# Altium PCB PCB1.PcbDoc
Units mil, origin at the board's own origin, x right, y up, seen from the top; angles counter-clockwise.
Board outline 4360 x 4560 mil, 4 copper layers (Top Layer, Layer 1, Layer 2, Bottom Layer), stack 23.756 mil thick; 48 components, 114 nets, 326 pads, 38 vias.
Unrouted connection lines stored in the file: 18.
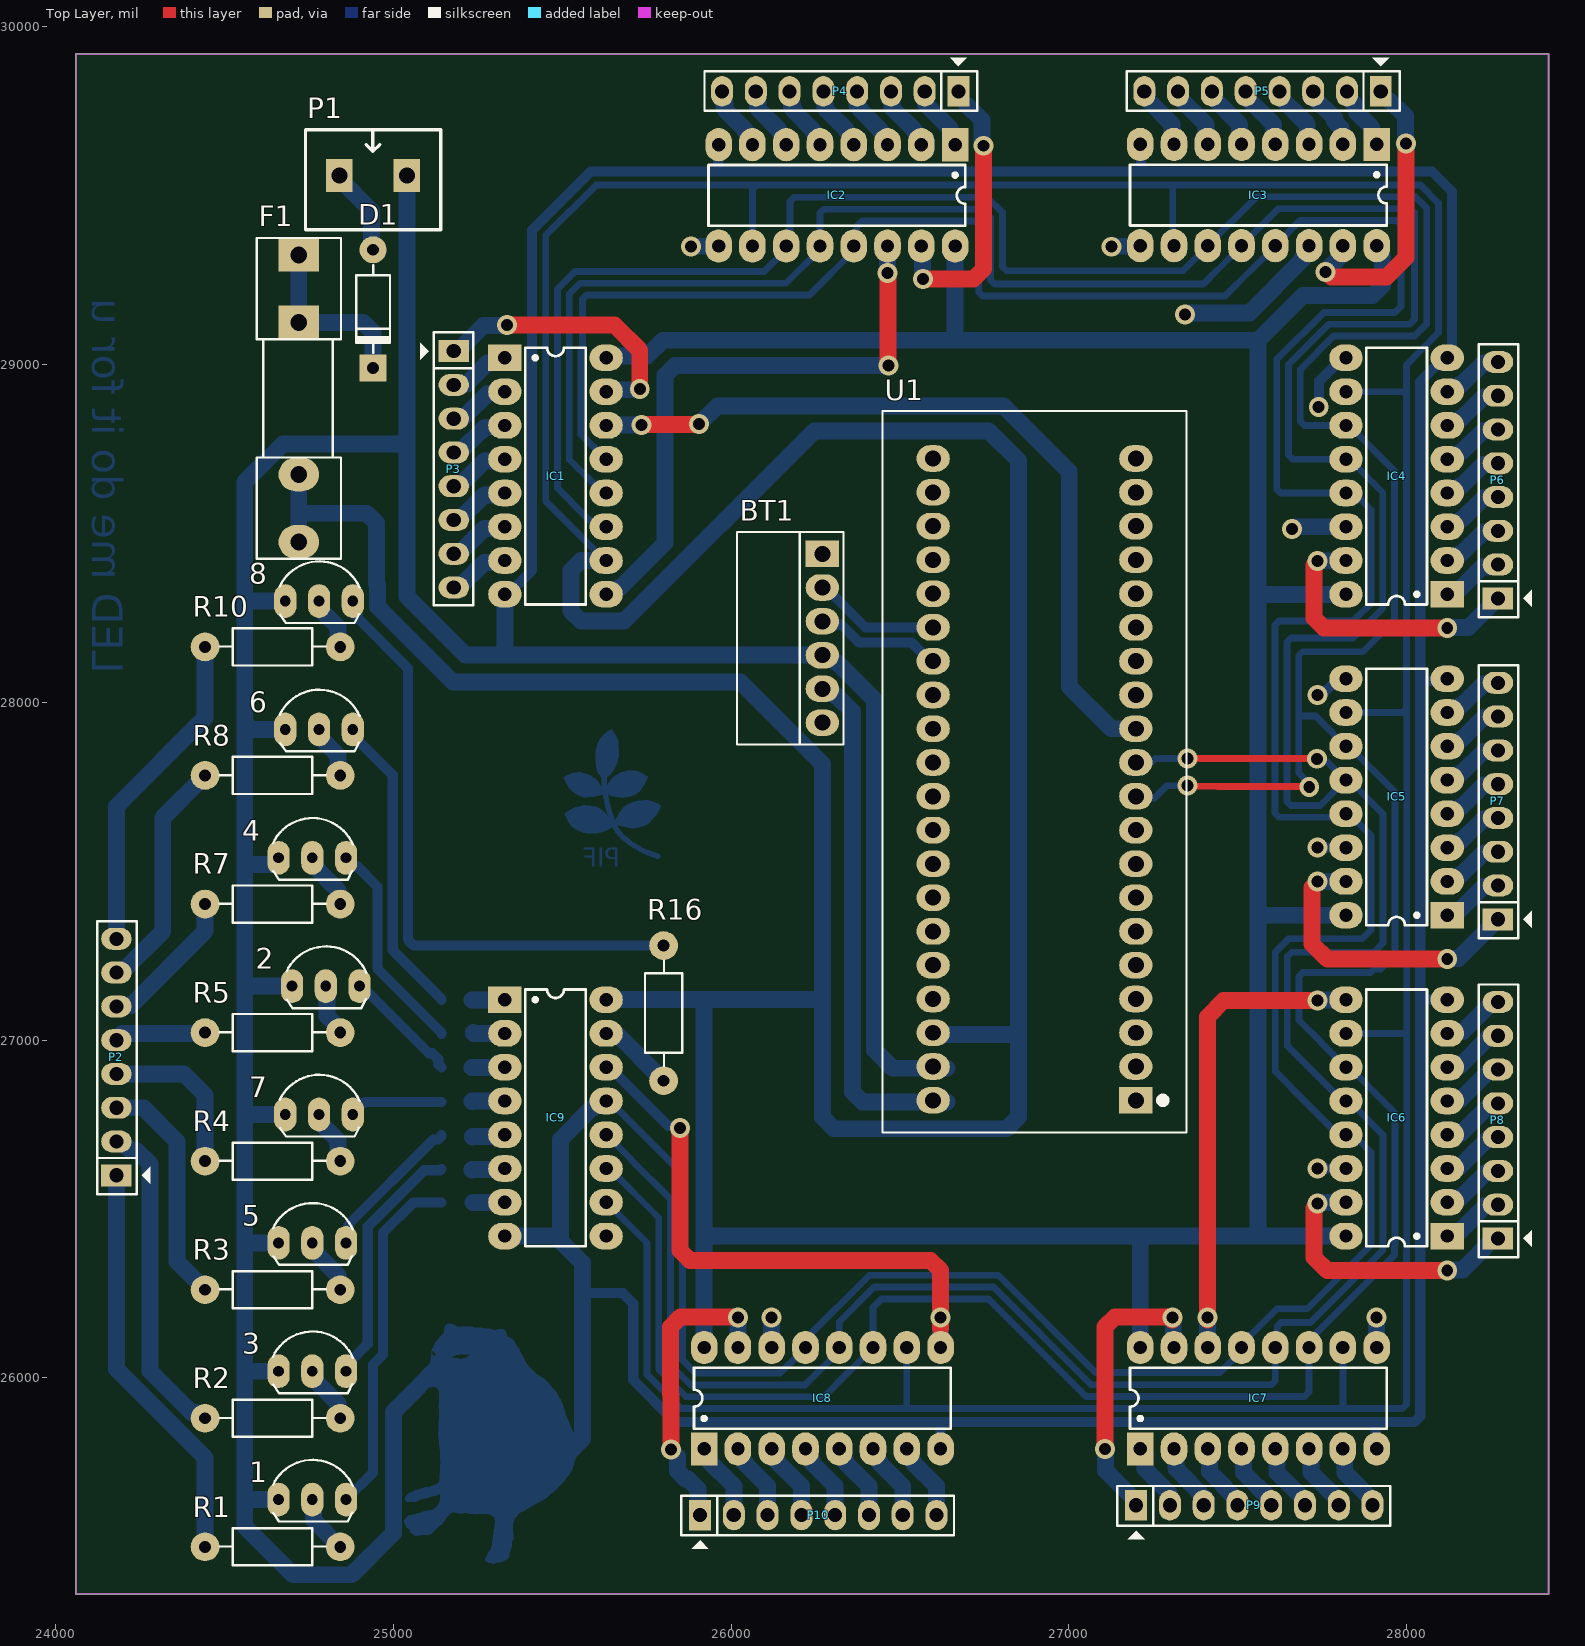
[diagram p0: Top Layer view]
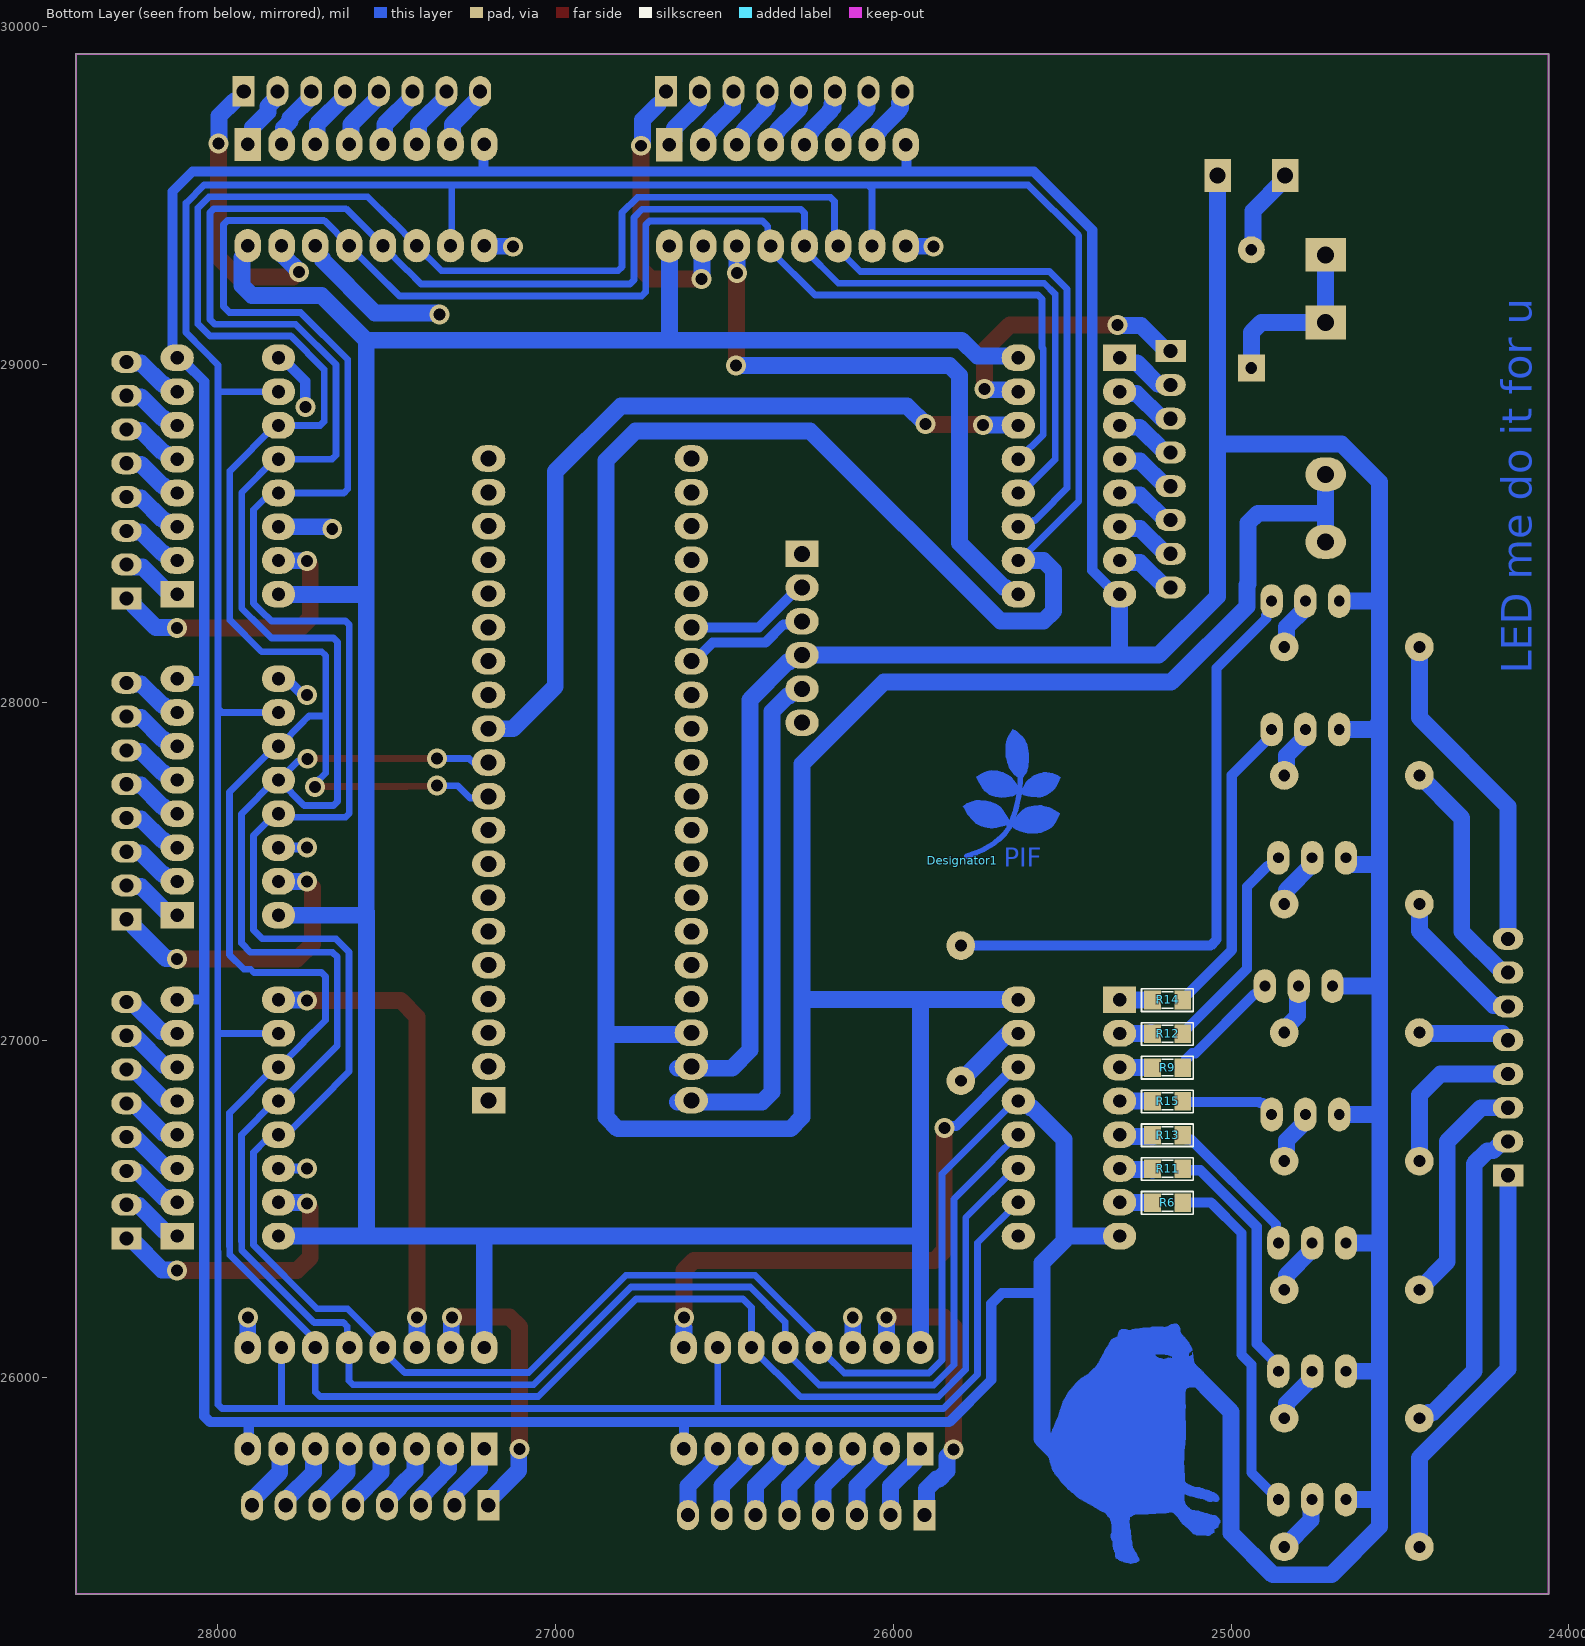
[diagram p1: Bottom Layer view, seen from below]
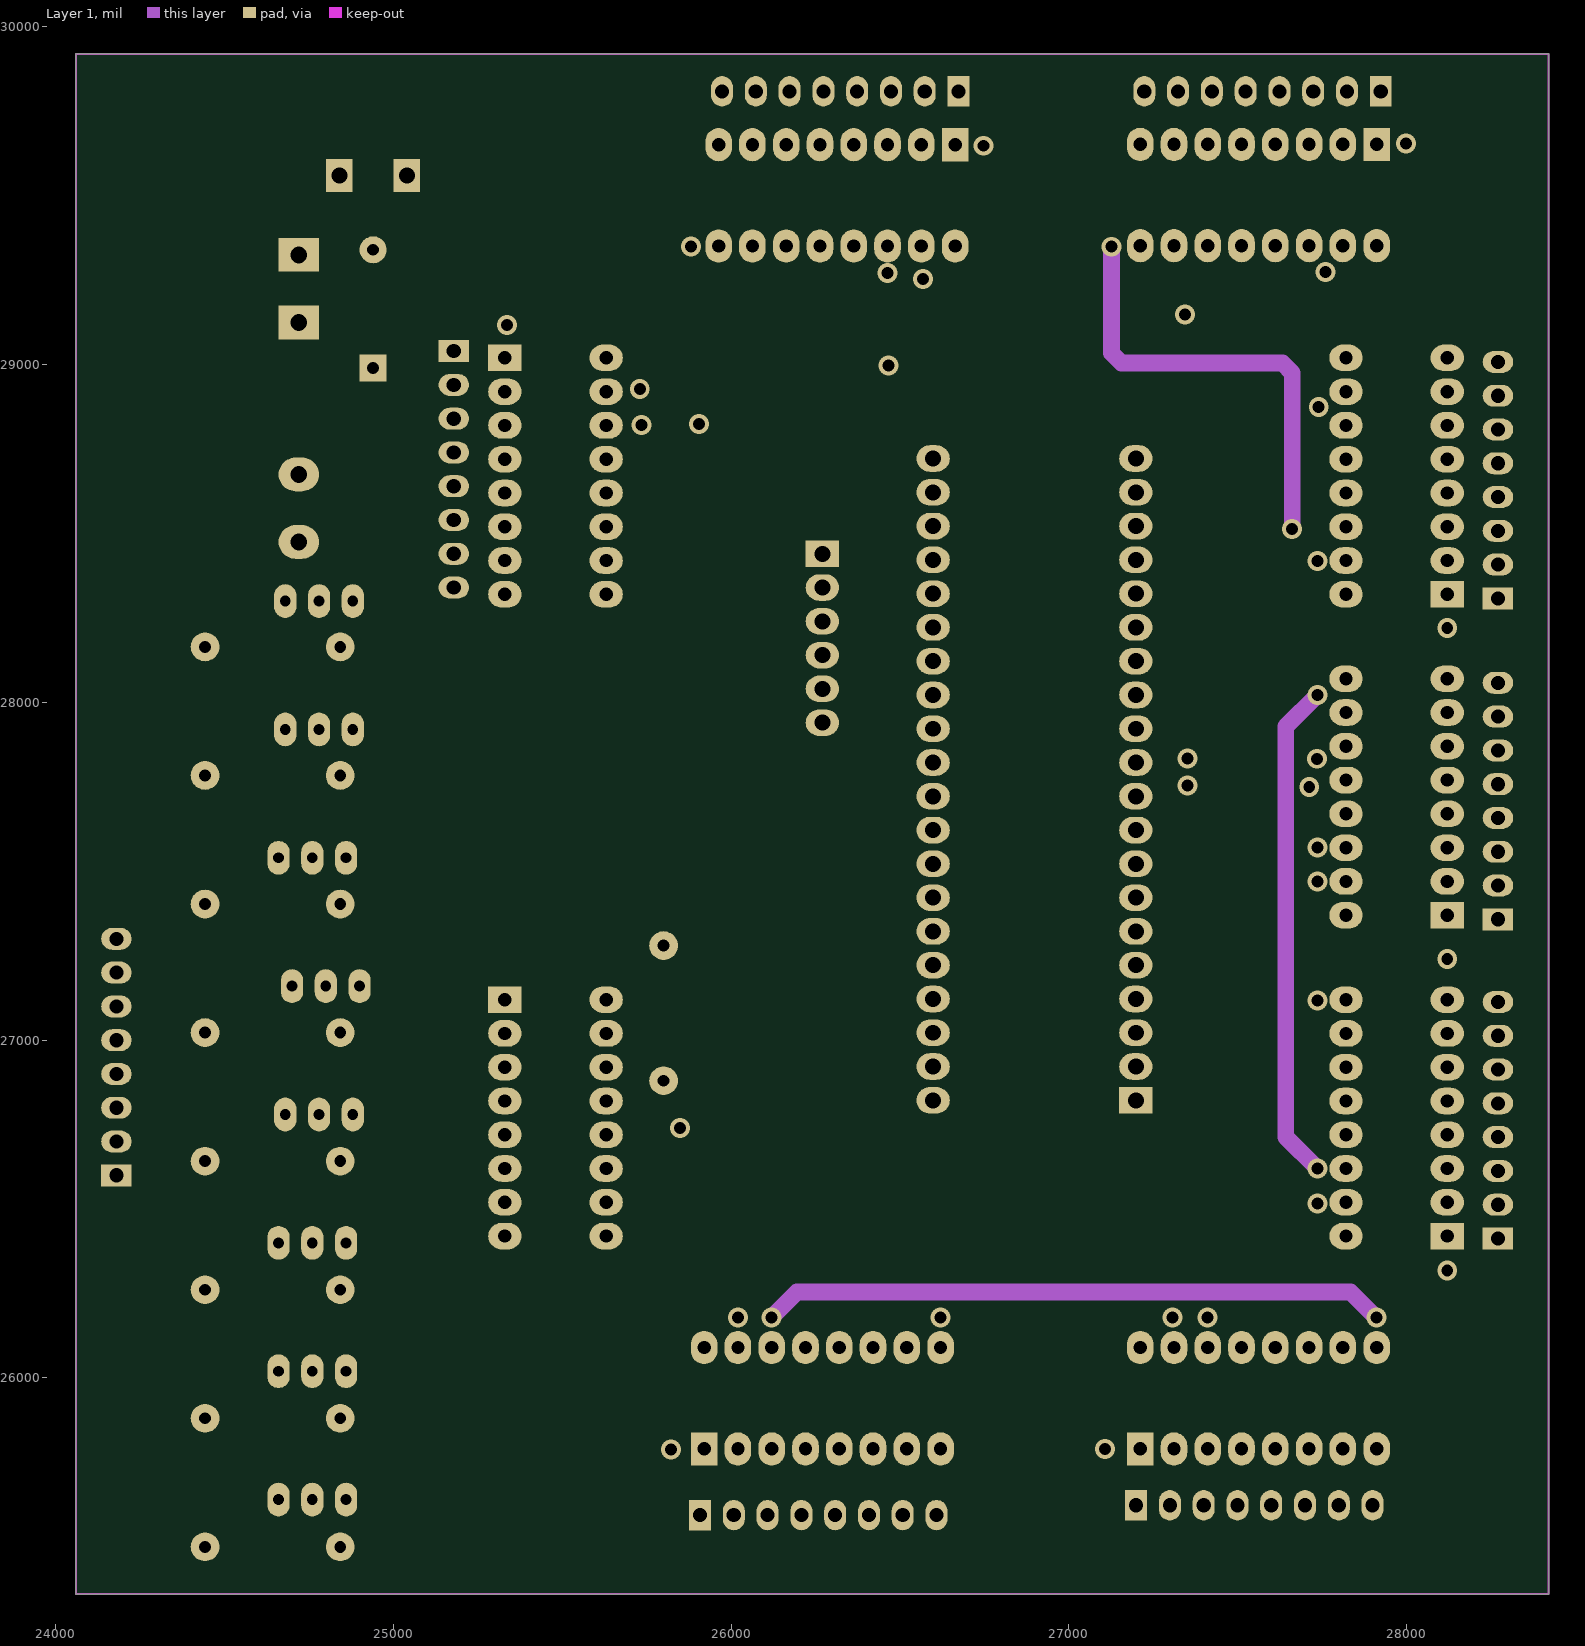
[diagram p2: Layer 1]
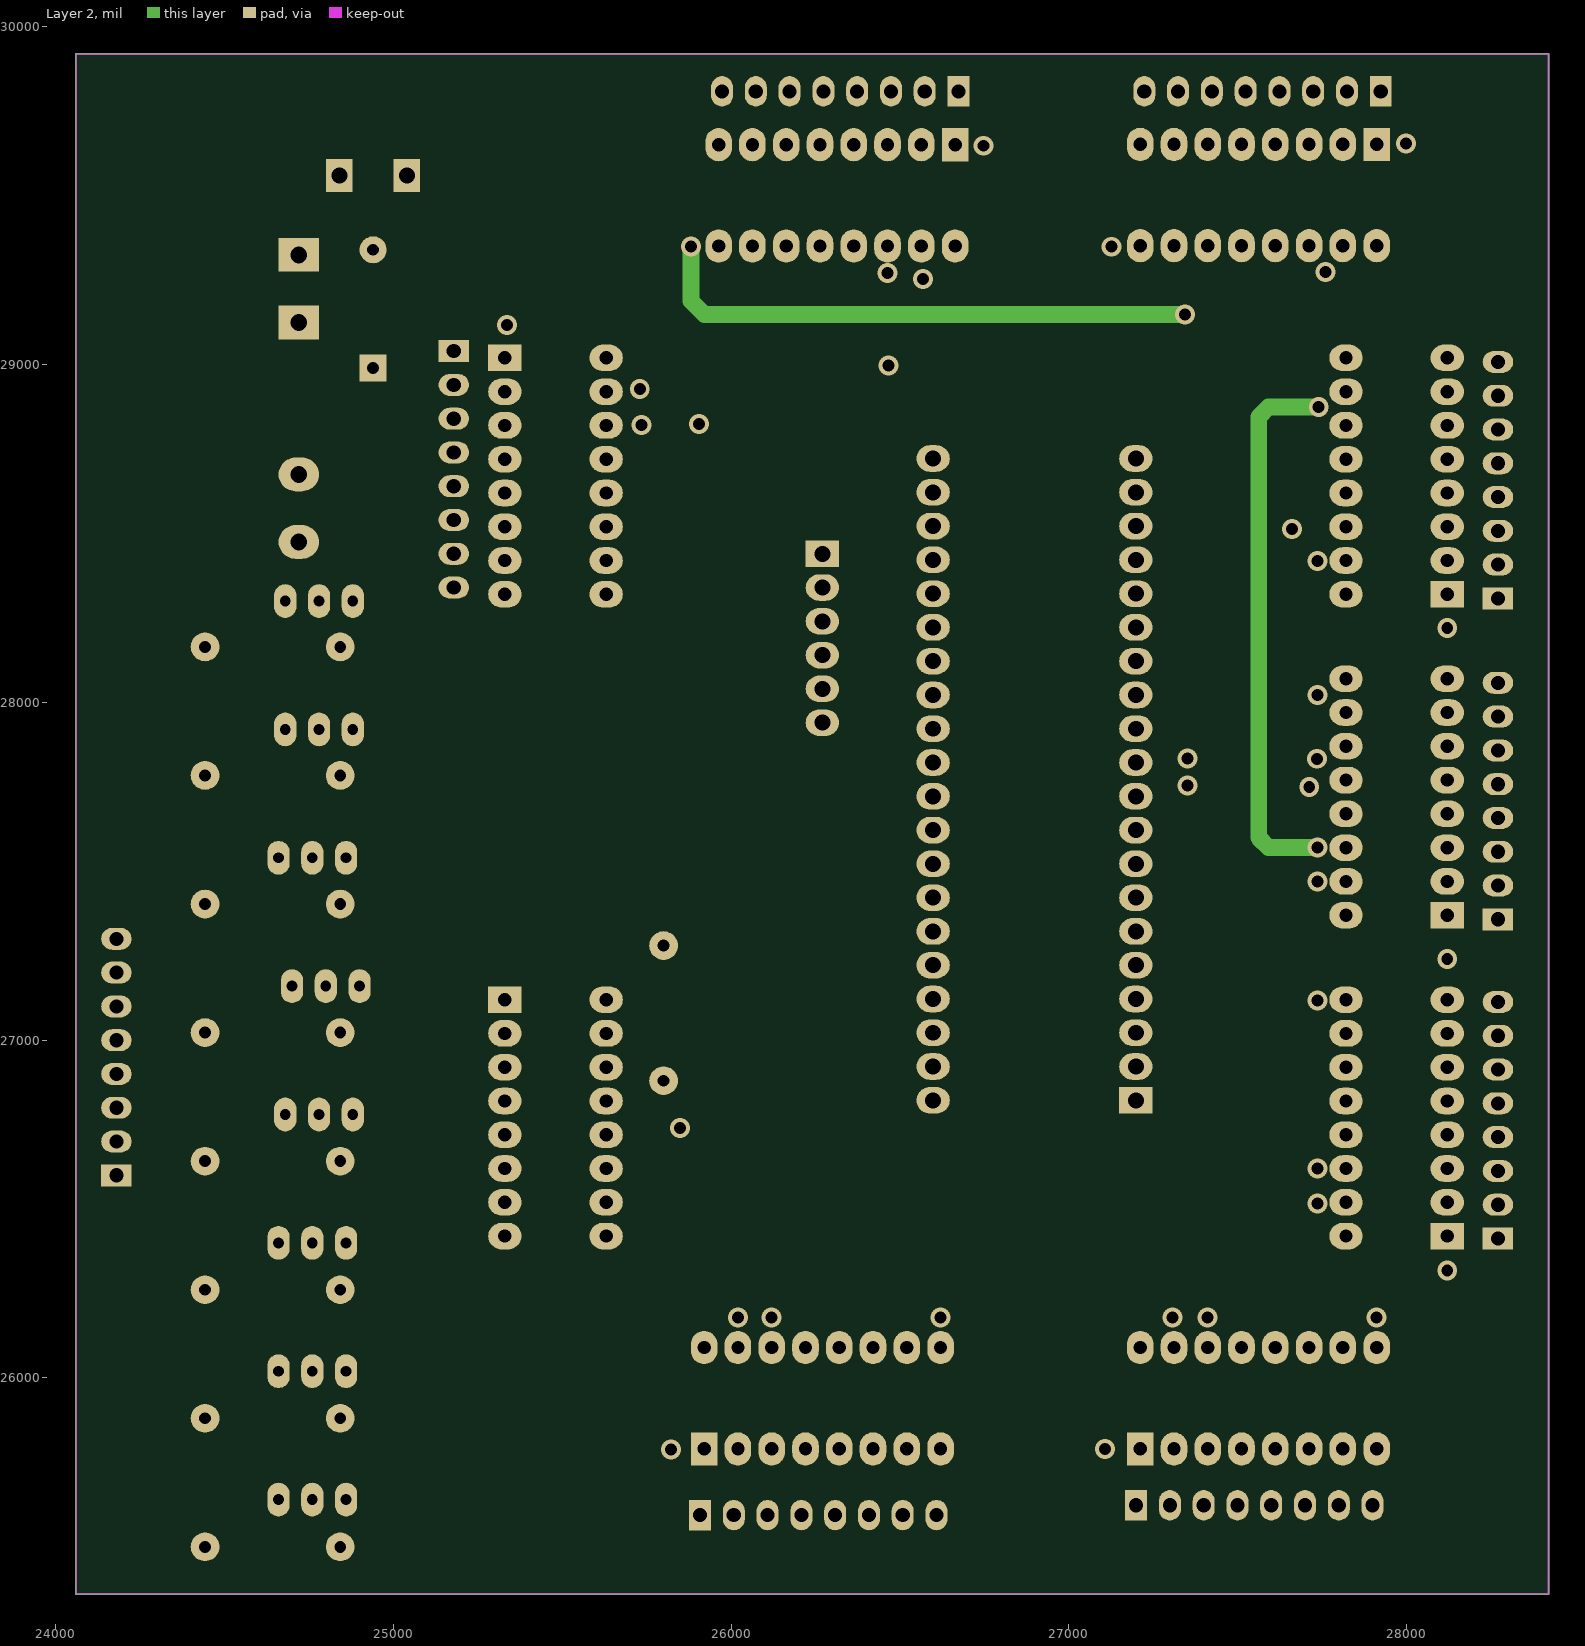
[diagram p3: Layer 2]
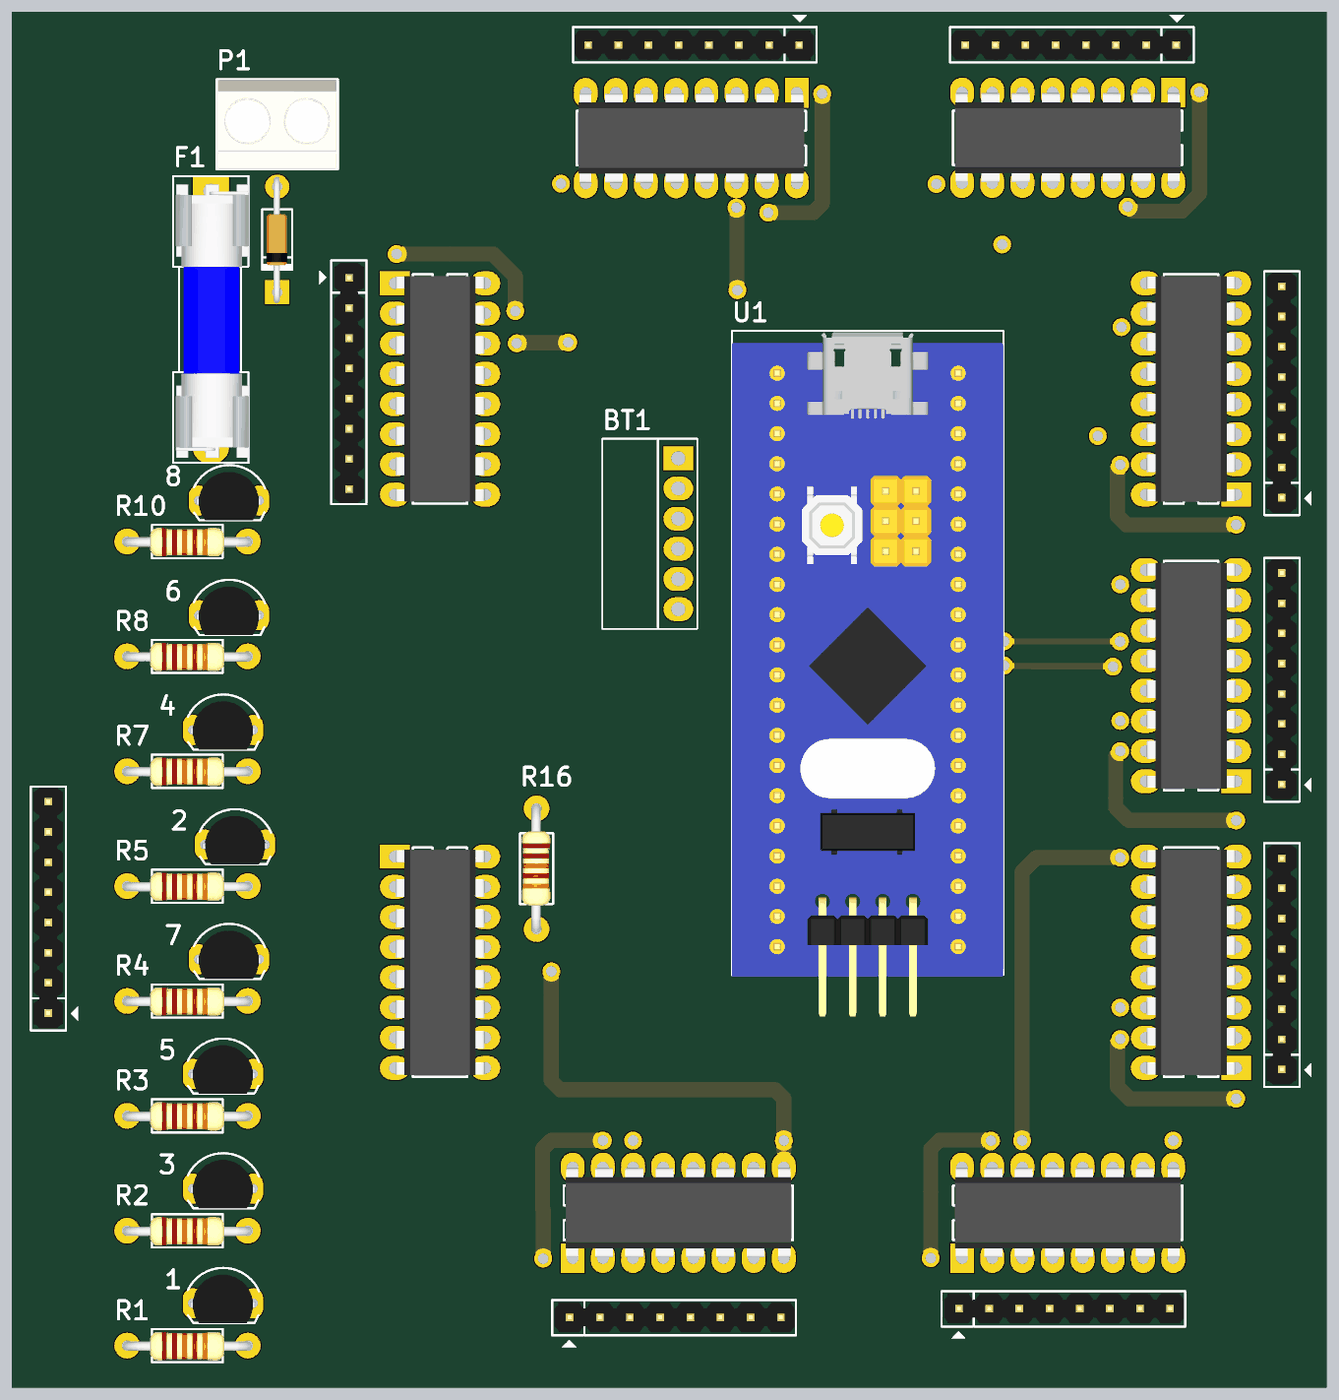
[diagram p4: 3D render of the assembled board from above, using the file's embedded part models]
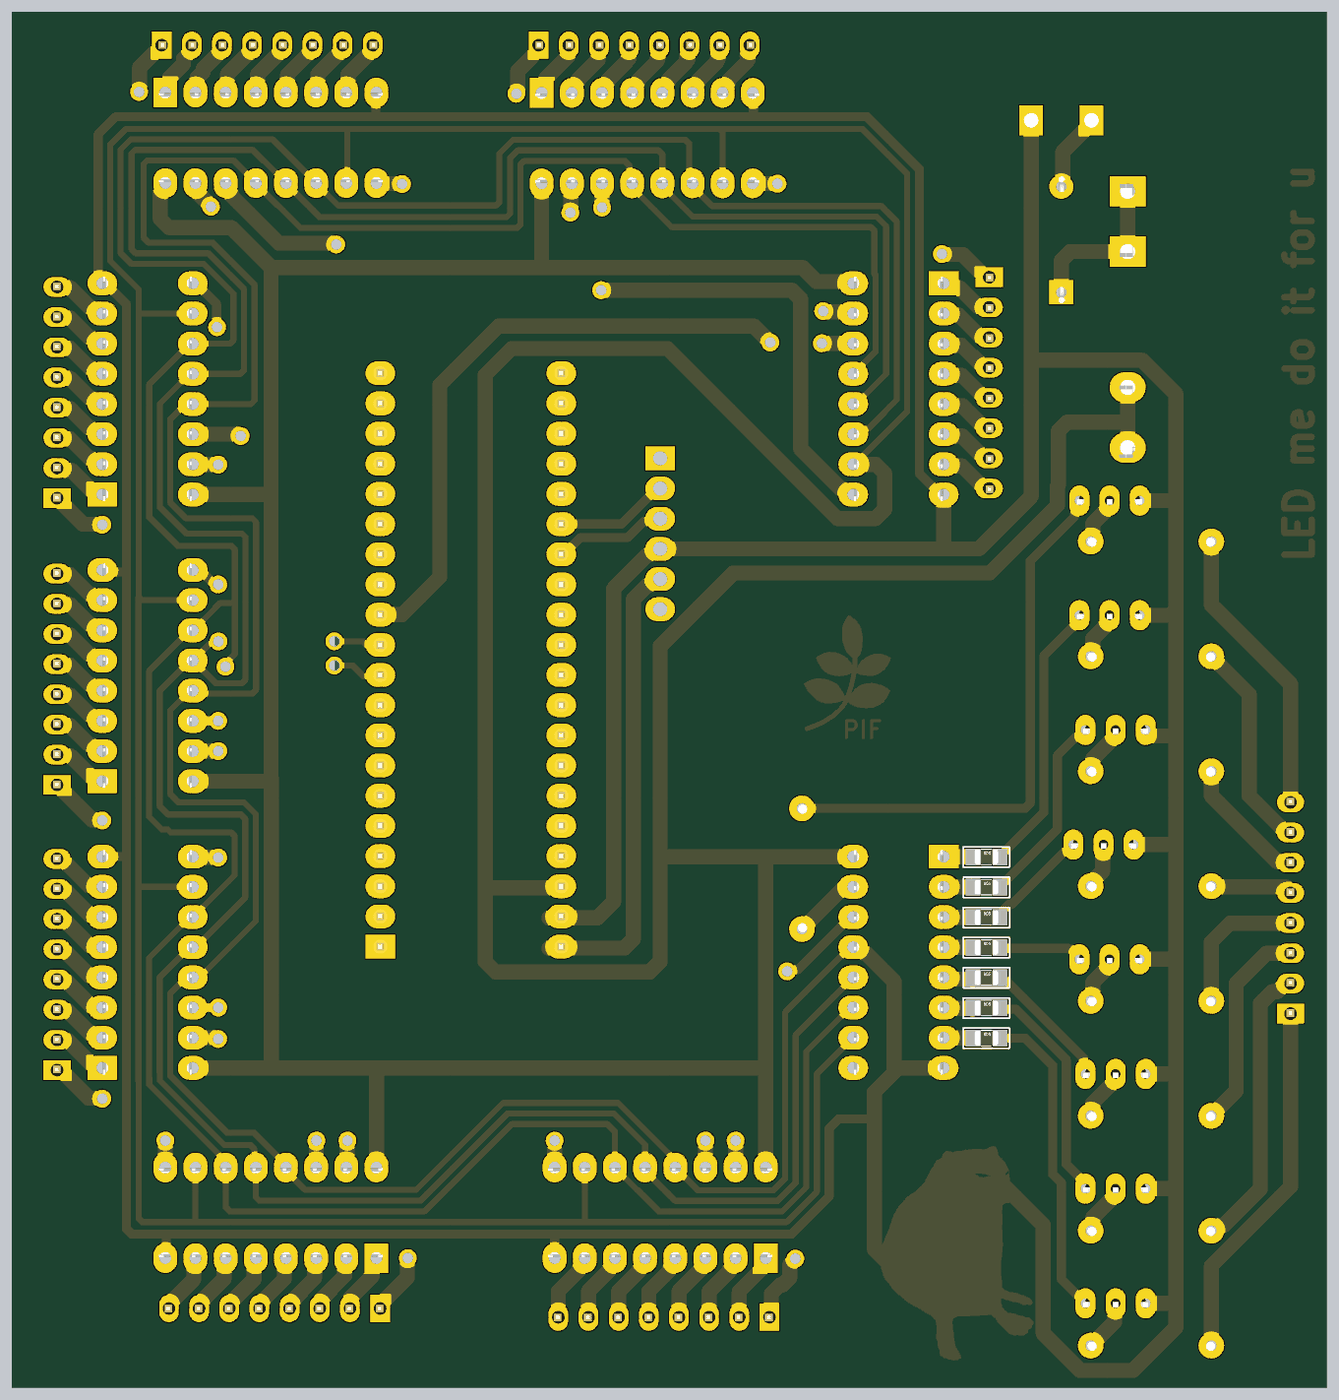
[diagram p5: 3D render of the assembled board from below, using the file's embedded part models]

## Layer stack, top to bottom
Top Solder: solder mask 0.4, Solder Resist, Dk 3.5
Top Layer: signal copper 1.4
Dielectric 2: prepreg 2.8, PP-006, Dk 4.1
Layer 1: signal copper 1.378
Dielectric 1: dielectric 12.6, FR-4, Dk 4.8
Layer 2: signal copper 1.378
Dielectric 3: prepreg 2.8, PP-006, Dk 4.1
Bottom Layer: signal copper 1.4
Bottom Solder: solder mask 0.4, Solder Resist, Dk 3.5

## Board outline
24060,25360 24060,29920 28420,29920 28420,25360

## Design rules (kind name [scope] priority, off if disabled: settings)
Clearance [All] p1: gap=15 ignorepadtopadclearanceinfootprint=FALSE
Height [All] p1: minheight=0 maxheight=10000 prefheight=500
PolygonConnect [All] p1: connectstyle=Direct reliefconductorwidth=10 reliefentries=4 polygonreliefangle="90 Angle" airgapwidth=10
RoutingVias [All] p1: holewidth=28 width=50 viastyle="Through Hole" minholewidth=28 minwidth=50 maxholewidth=39.37 maxwidth=59.06
SolderMaskExpansion [All] p1: expansion=4 istentingtop=FALSE
Width [All] p1: maxlimit=50 minlimit=20 preferedwidth=30
29 further rules are at their usual default settings.

## Classes and differential pairs
net class [0..72]: 0 1 2 3 4 5 6 7 8 9 10 11 12 13 14 15 16 17 18 19 20 21 22 23 24 25 26 27 28 29 30 31 32 33 34 35 36 37 38 39 40 41 42 43 44 45 46 47 48 49 50 51 52 53 54 55 56 57 58 59 60 61 62 63 64 65 66 67 68 69 70 71 72
component class Signal: BT1 U1
component class Shift: IC1 IC2 IC3 IC4 IC5 IC6 IC7 IC8 IC9
component class Power: D1 F1 P1
component class Designator: 1 2 3 4 5 6 7 8 P2 P3 P4 P5 P6 P7 P8 P9 P10 R1 R2 R3 R4 R5 R6 R7 R8 R9 R10 R11 R12 R13 R14 R15 R16

## Components (designator, comment, footprint, x,y, rotation, side; value= is the part's Value field where it differs from the comment)
1 "C1815" QTO-92 24760,25640 r0 top
2 "C1815" QTO-92 24800,27160 r0 top
3 "C1815" QTO-92 24760,26020 r0 top
4 "C1815" QTO-92 24760,27540 r0 top
5 "C1815" QTO-92 24760,26400 r0 top
6 "C1815" QTO-92 24780,27920 r0 top
7 "C1815" QTO-92 24780,26780 r0 top
8 "C1815" QTO-92 24780,28300 r0 top
BT1 "HC-05" HC-05 26270,28190 r270 top
D1 "Diode" D1A 24940,29340 r90 top
Designator1 "Comment" "PIF LOGO BIG TOP" 25794,27531 r180 bottom
F1 "Fuse" FUSE 24720,28900 r270 top
IC1 "74HC595" 74HC595 25480,28670 r270 top
IC2 "74HC595" 74HC595 26313,29501 r180 top
IC3 "74HC595" 74HC595 27561,29502 r180 top
IC4 "74HC595" 74HC595 27970,28670 r90 top
IC5 "74HC595" 74HC595 27970,27720 r90 top
IC6 "74HC595" 74HC595 27970,26770 r90 top
IC7 "74HC595" 74HC595 27561,25940 r0 top
IC8 "74HC595" 74HC595 26270,25940 r0 top
IC9 "74HC595" 74HC595 25480,26770 r270 top
P1 "Domino 2" "DOMINO 2- 5mm" 24940,29560 r0 top
P2 "Header 8" JP8 24180,26600 r90 top
P3 "Header 8" JP8 25179,29040 r270 top
P4 "Header 8" JP8 26673,29809 r180 top
P5 "Header 8" JP8 27923.13,29809 r180 top
P6 "Header 8" JP8 28270,28307.87 r90 top
P7 "Header 8" JP8 28270,27357.87 r90 top
P8 "Header 8" JP8 28270,26413 r90 top
P9 "Header 8" JP8 27198.87,25623 r0 top
P10 "Header 8" JP8 25907.87,25594 r0 top
R1 "RESISTOR" "RES 1/2W" 24842.5,25500 r180 top value=1K
R2 "RESISTOR" "RES 1/2W" 24842.5,25880.62 r180 top value=1K
R3 "RESISTOR" "RES 1/2W" 24842.5,26261.23 r180 top value=1K
R4 "RESISTOR" "RES 1/2W" 24842.5,26641.85 r180 top value=1K
R5 "RESISTOR" "RES 1/2W" 24842.5,27022.46 r180 top value=1K
R6 "RESISTOR" RES-SM-0805 25233,26519 r180 bottom value=1K
R7 "RESISTOR" "RES 1/2W" 24842.5,27403.08 r180 top value=1K
R8 "RESISTOR" "RES 1/2W" 24842.5,27783.69 r180 top value=1K
R9 "RESISTOR" RES-SM-0805 25233,26919 r180 bottom value=1K
R10 "RESISTOR" "RES 1/2W" 24842.5,28164.31 r180 top value=1K
R11 "RESISTOR" RES-SM-0805 25233,26619 r180 bottom value=1K
R12 "RESISTOR" RES-SM-0805 25233,27019 r180 bottom value=1K
R13 "RESISTOR" RES-SM-0805 25233,26719 r180 bottom value=1K
R14 "RESISTOR" RES-SM-0805 25233,27119 r180 bottom value=1K
R15 "RESISTOR" RES-SM-0805 25233,26819 r180 bottom value=1K
R16 "RESISTOR" "RES 1/2W" 25800,26880 r90 top value=1K
U1 "BluePill" BluePill 26898,27772 r90 top

## Footprints (in the part's own frame and the unit in brackets; to place one, negate y for a bottom-side part, rotate by r counter-clockwise, add the part's x,y. Pads: shape width x height; smd on the part's side, far side on the other; paste and mask are expansions set on the pad)
74HC595 [mm]
  rect 2x2.5 hole 1: 1(-8.89,-3.81)
  oval 2x2.5 hole 1: 2(-6.35,-3.81) 3(-3.81,-3.81) 4(-1.27,-3.81) 5(1.27,-3.81) 6(3.81,-3.81) 7(6.35,-3.81) 8(8.89,-3.81) 9(8.89,3.81) 10(6.35,3.81) 11(3.81,3.81) 12(1.27,3.81) 13(-1.27,3.81) 14(-3.81,3.81) 15(-6.35,3.81) 16(-8.89,3.81)
  silkscreen extent -9.65,-2.29 9.65,2.29, body extent -9.5,-3.75 9.5,3.75, height 4
BluePill [mm]
  rect 2x2.5 hole 1.2: 1(-24.13,-7.62)
  oval 2x2.5 hole 1.2: 2(-21.59,-7.62) 3(-19.05,-7.62) 4(-16.51,-7.62) 5(-13.97,-7.62) 6(-11.43,-7.62) 7(-8.89,-7.62) 8(-6.35,-7.62) 9(-3.81,-7.62) 10(-1.27,-7.62) 11(1.27,-7.62) 12(3.81,-7.62) 13(6.35,-7.62) 14(8.89,-7.62) 15(11.43,-7.62) 16(13.97,-7.62) 17(16.51,-7.62) 18(19.05,-7.62) 19(21.59,-7.62) 20(24.13,-7.62) 21(24.13,7.62) 22(21.59,7.62) 23(19.05,7.62) 24(16.51,7.62) 25(13.97,7.62) 26(11.43,7.62) 27(8.89,7.62) 28(6.35,7.62) 29(3.81,7.62) 30(1.27,7.62) 31(-1.27,7.62) 32(-3.81,7.62) 33(-6.35,7.62) 34(-8.89,7.62) 35(-11.43,7.62) 36(-13.97,7.62) 37(-16.51,7.62) 38(-19.05,7.62) 39(-21.59,7.62) 40(-24.13,7.62)
  silkscreen extent -26.54,-11.43 27.69,11.43, body extent -30,-11.43 27.56,11.43, height 12.35
D1A [mil] "Diode 1N4007, W 100mil, L 350mil"
  round 80 hole 35: 1(0,0)
  rect 80x80 hole 35: 2(-350,0)
  silkscreen extent -305,-50 -45,50, body extent -386,-33 34,36, height 84
"DOMINO 2- 5mm" [mm]
  rect 2x2.5 hole 1.2: 1(-2.54,0) 2(2.54,0)
  silkscreen extent -5.08,-4.08 5.08,3.43, body extent -5,-4.07 5,3.43, height 10
FUSE [mil] "De Fuse"
  rect 100x120 hole 50: 1(-425,0) 1(-225,0)
  oval 100x120 hole 50: 2(225,0) 2(425,0)
  silkscreen extent -475,-125 475,125, body extent -448,-117 459,127, height 378
HC-05 [mm]
  rect 2x2.5 hole 1.2: 1(-6.35,0)
  oval 2x2.5 hole 1.2: 2(-3.81,0) 3(-1.27,0) 4(1.27,0) 5(3.81,0) 6(6.35,0)
  silkscreen extent -8,-6.4 8,1.6, body extent -8,-6.35 8,0.2, height 40.5
JP8 [mil] "JP8"
  rect 65x90 hole 42: 1(0,0)
  oval 65x90 hole 42: 2(100,0) 3(200,0) 4(300,0) 5(400,0) 6(500,0) 7(600,0) 8(700,0)
  silkscreen extent -56,-100 752,57, body extent -48,-50 748,48, height 323
"PIF LOGO BIG TOP" [mil]
  Top Layer region: 225.34,164.82 225.4,164.84 233.33,164 233.38,163.98 233.44,163.98 240.93,161.92 255.92,158.15 255.96,158.13 256.01,158.13 261.01,156.06 261.03,156.04 261.06,156.03 272.3,150.2 272.32,150.17 272.36,150.17 282.36,143.5 282.37,143.47 282.4,143.47 286.57,140.13 286.64,140 286.75,139.89 286.75,139.79 286.8,139.7 286.76,139.56 286.76,139.4 283.86,131.9 283.84,131.87 283.83,131.84 279.23,123.07 279.23,123.07 279.23,123.06 275.9,116.83 275.87,116.81 275.86,116.77 267.12,104.27 267.08,104.23 267.05,104.18 261.22,98.35 261.16,98.32 261.13,98.27 254.46,93.67 254.42,93.66 254.39,93.63 247.72,90.29 247.71,90.29 247.71,90.29 238.11,85.72 238.09,85.72 238.09,85.71 232.25,83.21 232.17,83.21 232.11,83.17 222.11,81.5 222.06,81.51 222.02,81.49 207.02,81.06 206.99,81.07 206.97,81.06 191.13,81.89 191.09,81.92 191.04,81.91 178.97,84.41 178.95,84.42 178.92,84.42 168.92,87.35 168.88,87.38 168.83,87.38 158.83,91.95 158.81,91.98 158.77,91.99 151.27,96.59 151.24,96.62 151.21,96.63 145.78,100.79 145.76,100.83 145.71,100.85 145.68,100.94 145.6,101.01 145.59,101.12 145.53,101.22 145.54,101.26 145.53,101.3 145.56,101.39 145.56,101.49 153.49,126.49 153.63,126.66 153.74,126.83 156.17,128.45 165.28,139.21 169.44,144.21 169.49,144.24 169.51,144.28 175.75,149.68 175.79,149.7 175.82,149.74 186.26,156.41 186.3,156.41 186.32,156.44 195.06,160.61 195.14,160.62 195.21,160.66 210.21,163.6 210.25,163.59 210.28,163.6 225.28,164.84
  Top Layer region: 247.66,262.28 247.74,262.3 257.74,260.63 257.76,260.62 257.78,260.62 266.94,258.52 266.99,258.49 267.06,258.49 273.72,255.59 273.72,255.59 273.72,255.59 280.39,252.65 280.44,252.61 280.5,252.59 288.83,246.76 288.94,246.59 289.07,246.44 289.07,246.39 289.1,246.34 289.05,246.15 289.04,245.95 287.38,242.64 284.89,236.43 284.88,236.41 284.87,236.38 281.14,228.88 281.14,228.88 281.14,228.88 276.54,219.71 276.49,219.67 276.47,219.6 271.47,213.33 271.46,213.33 271.45,213.32 266.45,207.48 266.39,207.45 266.35,207.38 258.45,201.55 258.43,201.55 258.41,201.53 246.75,194.03 246.68,194.02 246.62,193.97 236.62,190.23 236.6,190.23 236.59,190.22 231.15,188.55 231.08,188.56 231.02,188.53 220.62,187.69 220.56,187.71 220.5,187.7 200.9,189.76 200.89,189.77 200.87,189.77 192.14,191.03 192.11,191.05 192.07,191.05 185.8,192.71 185.79,192.73 185.76,192.73 180.76,194.39 180.71,194.44 180.64,194.45 173.57,198.62 173.52,198.68 173.45,198.71 173.43,198.76 173.38,198.79 173.35,198.91 173.28,199.01 173.29,199.09 173.26,199.17 173.28,199.22 173.27,199.27 175.33,212.17 175.39,212.26 175.4,212.36 182.5,226.13 182.53,226.15 182.53,226.19 187.53,233.69 187.59,233.73 187.61,233.79 194.61,240.79 194.65,240.8 194.66,240.83 203.5,248 203.53,248.01 203.54,248.03 204.53,248.7 204.54,248.7 204.55,248.71 206.58,249.95 206.6,249.95 206.61,249.97 208.7,251.11 208.71,251.11 208.72,251.12 210.86,252.17 210.88,252.17 210.89,252.18 211.97,252.65 219.03,255.98 219.04,255.98 219.06,255.99 228.22,259.76 228.28,259.76 228.34,259.79 236.27,261.46 236.31,261.45 236.35,261.47 247.59,262.31
  Top Layer region: 51.34,179.76 51.38,179.77 68.45,178.51 68.51,178.48 68.57,178.48 81.91,174.75 81.94,174.72 81.98,174.72 99.91,167.22 99.94,167.19 99.98,167.19 108.72,162.19 108.76,162.13 108.83,162.1 113.83,157.5 113.86,157.44 113.92,157.41 118.09,151.57 118.09,151.56 118.1,151.56 123.1,144.06 123.1,144.05 123.1,144.05 131.44,131.15 131.44,131.11 131.47,131.09 133.97,126.09 136.91,120.25 136.92,120.1 136.97,119.97 136.97,118.3 136.93,118.19 136.93,118.06 132.03,105.73 131.99,105.69 131.98,105.63 131.92,105.59 131.89,105.51 131.77,105.47 131.69,105.38 131.63,105.38 131.58,105.34 124,103.52 118.59,101.85 118.56,101.86 118.53,101.84 110.63,100.17 110.63,100.17 110.62,100.17 99.79,98.07 99.78,98.07 99.78,98.07 90.18,96.4 90.12,96.42 90.07,96.39 80.9,96.39 80.87,96.4 80.84,96.4 71.68,97.23 71.63,97.25 71.59,97.24 64.52,98.91 64.5,98.92 64.49,98.92 54.49,101.85 54.43,101.9 54.36,101.91 43.09,108.14 43.08,108.16 43.05,108.16 37.22,111.93 37.18,111.99 37.11,112.02 25.44,124.09 25.44,124.09 25.43,124.09 18.37,131.59 18.36,131.61 18.34,131.62 13.74,137.05 13.72,137.12 13.67,137.16 10.34,143.39 3.68,155.05 3.68,155.06 3.67,155.07 0.33,161.33 0.31,161.54 0.27,161.75 0.29,161.78 0.29,161.82 0.42,161.99 0.54,162.16 12.21,170.06 12.27,170.08 12.31,170.12 19.81,173.45 19.85,173.45 19.88,173.48 29.48,176.41 29.49,176.41 29.49,176.42 38.22,178.92 38.29,178.91 38.36,178.94 51.29,179.77
  Top Layer region: 147.8,389.42 148.04,389.41 155.11,386.08 155.14,386.05 155.18,386.04 161.01,382.27 161.04,382.23 161.09,382.21 169.03,375.14 169.03,375.14 169.04,375.13 175.27,369.3 175.29,369.25 175.35,369.22 181.61,360.88 181.61,360.88 181.62,360.88 184.95,356.28 184.97,356.21 185.02,356.16 187.92,349.49 187.92,349.48 187.92,349.48 190.02,344.48 190.02,344.42 190.06,344.37 192.56,333.14 192.56,333.13 192.56,333.13 194.23,325.2 194.22,325.18 194.23,325.16 195.47,316.42 195.46,316.38 195.47,316.33 195.47,307.17 195.47,307.15 195.47,307.13 194.64,294.19 194.64,294.19 194.64,294.18 193.81,283.35 193.79,283.32 193.8,283.29 192.96,278.29 192.96,278.29 192.96,278.28 191.3,269.55 191.28,269.52 191.28,269.48 190.25,266.05 190.22,266.02 190.22,265.98 187.42,259.58 187.37,259.53 187.36,259.47 183.76,254.27 183.73,254.25 183.72,254.21 178.12,247.81 178.05,247.78 178.02,247.72 176.68,246.72 176.74,243.41 176.71,243.32 176.72,243.23 176.62,243.1 176.56,242.96 176.47,242.92 176.41,242.84 176.26,242.82 176.11,242.76 176.02,242.79 175.93,242.78 165.49,245.72 165.42,245.77 165.33,245.79 159.93,249.12 159.91,249.15 159.87,249.16 150.27,256.66 150.23,256.73 150.16,256.78 141.83,267.61 141.81,267.66 141.77,267.69 138.04,274.35 138.04,274.4 138,274.44 134.23,284.44 131.34,291.94 131.34,291.98 131.31,292.01 129.21,300.34 129.21,300.34 129.21,300.35 127.15,308.68 127.15,308.74 127.13,308.8 126.69,316.3 126.7,316.31 126.69,316.33 126.69,332.17 126.7,332.19 126.7,332.22 127.53,341.79 127.53,341.8 127.53,341.8 128.8,353.07 128.84,353.14 128.83,353.22 131.73,361.12 131.74,361.13 131.74,361.13 134.67,368.63 134.71,368.68 134.72,368.73 140.55,378.33 140.57,378.34 140.57,378.36 145.11,384.99 147.19,389.12 147.37,389.28 147.55,389.44 147.56,389.44 147.57,389.44
  Top Layer region: 103.01,266.37 103.07,266.34 103.14,266.35 112.3,263.85 112.31,263.84 112.33,263.84 118.99,261.74 119.04,261.71 119.1,261.7 126.2,257.97 126.27,257.89 132.43,254.63 132.45,254.61 132.48,254.6 144.58,246.67 144.65,246.58 144.74,246.53 156.41,231.53 156.42,231.49 156.45,231.47 164.35,218.57 164.35,218.56 164.35,218.56 166.85,214.4 166.88,214.18 166.93,213.97 164.87,200.2 164.83,200.15 164.84,200.08 164.74,199.98 164.69,199.85 164.64,199.83 164.61,199.78 164.55,199.77 164.51,199.72 147.84,191.82 147.77,191.82 147.71,191.77 128.94,187.61 128.88,187.62 128.82,187.59 114.25,187.16 114.2,187.18 114.14,187.17 96.64,189.67 96.6,189.69 96.55,189.69 85.29,193.02 85.26,193.04 85.22,193.04 78.15,195.98 78.1,196.03 78.02,196.05 73.02,199.79 73.01,199.79 73,199.8 65.07,206.06 65.05,206.11 65,206.13 58.77,212.8 58.74,212.87 58.68,212.91 48.25,230.81 48.24,230.84 48.22,230.86 43.22,241.29 43.22,241.31 43.21,241.32 40.31,248.39 40.31,248.58 40.27,248.76 40.31,248.82 40.31,248.88 40.44,249.01 40.55,249.17 51.38,256.27 51.42,256.28 51.44,256.3 63.51,262.54 63.56,262.54 63.6,262.57 71.1,265.07 71.11,265.07 71.12,265.08 76.96,266.75 77.01,266.74 77.06,266.77 84.56,267.6 84.62,267.59 84.68,267.61
  Top Layer lines w15.75: 171,264.83 169.77,230.73 169.33,221.57 168.5,211.17 167.67,200.73 165.4,190.73 161.67,173.63 157.9,156.97 156.67,151.57 144.17,116.13 137.07,99.07 129.17,87.4 122.07,78.23 106.67,63.63 95,54.07 62.5,34.07 40.2,23.9 11.17,13.57
QTO-92 [mil] "TO-92"
  oval 66x100 hole 32: 1(-100,0) 2(0,0) 3(100,0)
  silkscreen extent -117,-65 120,118, body extent -109,-66 109,95, height 245
"RES 1/2W" [mil] "R 1/2W, 2 pin, 300mil"
  round 85 hole 35: 1(0,0) 2(400,0)
  silkscreen extent 42,-55 356,55, body extent -12,-45 414,49, height 91
RES-SM-0805 [mil]
  rect 50x55 smd: 1(0,0) 2(90,0)
  silkscreen extent -32,-34 121,33, body extent 6,-25 84,25, height 31

## Part data
1 2 3 4 5 6 7 8: "NPN Bipolar Transistor"
D1: "Default Diode"
IC1 IC2 IC3 IC4 IC5 IC6 IC7 IC8 IC9: Operating Temperature="-55°C ~ 125°C", Package / Case="16-DIP (0.300\", 7.62mm)", Voltage - Supply="2V ~ 6V", ComponentLink1Description=Banlinhkien, ComponentLink1URL=https://banlinhkien.com/74hc595-dip16-p6648401.html, ComponentLink2Description=Datasheet, ComponentLink2URL=https://pdf1.alldatasheet.com/datasheet-pdf/view/23121/STMICROELECTRONICS/74HC595.html, ComponentLink3Description=ICDayroi, ComponentLink3URL=https://icdayroi.com/74hc595n, Function="Serial to Parallel, Serial", Logic Type="Shift Register", Number of Bits per Element=8, Number of Elements=1, Output Type="Output Type"
P1: "Domino, 2-Pin", LatestRevisionDate=17-Jul-2002, LatestRevisionNote="Re-released for DXP Platform.", Publisher="Altium Limited"
P2 P3 P4 P5 P6 P7 P8 P9 P10: "Header, 8-Pin", LatestRevisionDate=17-Jul-2002, LatestRevisionNote="Re-released for DXP Platform.", Publisher="Altium Limited"
R1 R2 R3 R4 R5 R6 R7 R8 R9 R10 R11 R12 R13 R14 R15 R16: "Resistor"
U1: "STM32F103C8T6, mbed-Enabled Development Bluepill STM32F1 ARM® Cortex®-M3 MCU 32-Bit Embedded Evaluation Board", Operating/input voltage=3.3V, Analog pins=10, ComponentLink1Description=Datasheet, ComponentLink1URL=https://components101.com/microcontrollers/stm32f103c8t8-blue-pill-development-board, ComponentLink2Description=Hshop, ComponentLink2URL=https://hshop.vn/products/kit-ra-chon-stm32f103c8t6, ComponentLink3Description=Banlinhkien, ComponentLink3URL=https://banlinhkien.com/kit-stm32f103c8t6-board-mini-p6649312.html, CPU speed=72MHz, Digital IO/PWM=37, EEPROM/SRAM(KB)=-/20, Flash=64/128K, I2C=2, Processor=STM32F103C9T6, SPI=2, UART=3, USB Connector=Micro
BT1: ComponentLink1Description=Datasheet, ComponentLink1URL=https://www.etechnophiles.com/wp-content/uploads/2020/10/HC-05-Datasheet-Download.pdf, ComponentLink2Description=Hshop, ComponentLink2URL=https://hshop.vn/products/mach-thu-phat-bluetooth-hc-05-do-ra-chon-master, ComponentLink3Description=Banlinhkien, ComponentLink3URL=https://banlinhkien.com/module-bluetooth-hc05-p6647275.html, ComponentLink4Description=ICDayroi, ComponentLink4URL=https://icdayroi.com/module-thu-phat-bluetooth-hc-05

## Via types
v1: diameter 59.06, hole 35.43, Top Layer to Bottom Layer, 38 vias

## Nets (pads, with @x,y where several pads share a name; then routed paths per layer and width w, separated by ;. In a path a pad name is that pad's centre, name@x,y a point inside that pad or via, vN(x,y) a via of type N, cw(c..) or ccw(c..) an arc to the next point about the centre after c; other vN are vias at no path point)
1: IC1.15 P3.1 | length 830.6
  Top Layer w50: v1(25336,29117) 25655.09,29117 25729.47,29042.62 v1(25729.47,28927.92)
  Bottom Layer w50: P3.1 25186.5,29047.5 25199,29047.5 25266.77,29115.27 25334.27,29115.27 v1(25336,29117) ; IC1.15 25635.5,28925.5 25724.6,28925.5 25727.02,28927.92 v1(25729.47,28927.92)
2: IC1.1 P3.2 | length 184.1
  Bottom Layer w50: P3.2 25181.87,28942.87 25215.94,28942.87 25278.7,29005.63 25315.63,29005.63 IC1.1
3: IC1.2 P3.3 | length 184.1
  Bottom Layer w50: P3.3 25181.87,28842.87 25207.86,28842.87 25279.49,28914.5 25324.5,28914.5 IC1.2
4: IC1.3 P3.4 | length 184.1
  Bottom Layer w50: P3.4 25195.56,28740 25233.43,28777.87 25234.79,28777.87 25271.42,28814.5 25324.5,28814.5 IC1.3
5: IC1.4 P3.5 | length 184.1
  Bottom Layer w50: P3.5 25194.53,28640 25269.03,28714.5 25324.5,28714.5 IC1.4
6: IC1.5 P3.6 | length 184.1
  Bottom Layer w50: P3.6 25194.53,28540 25269.03,28614.5 25324.5,28614.5 IC1.5
7: IC1.6 P3.7 | length 184.1
  Bottom Layer w50: P3.7 25194.53,28440 25269.03,28514.5 25324.5,28514.5 IC1.6
8: IC1.7 P3.8 | length 184.1
  Bottom Layer w50: P3.8 25194.53,28340 25269.03,28414.5 25324.5,28414.5 IC1.7
9: IC2.15 P4.1 | length 795.5
  Top Layer w50: v1@26570.45,29254 26717.61,29254 26746.9,29283.29 v1(26746.9,29648)
  Bottom Layer w50: IC2.15 26566.27,29347.73 26566.27,29255.73 v1(26568,29254) ; P4.1@26695.97,29770.03 26742.37,29723.63 26742.37,29654.98 26746.9,29650.45 v1(26746.9,29648)
10: IC2.1 P4.2 | length 195.3
  Bottom Layer w50: P4.2 26575.87,29806.13 26575.87,29772.06 26648.63,29699.3 26648.63,29665.37 IC2.1
11: IC2.2 P4.3 | length 195.3
  Bottom Layer w50: P4.3 26475.87,29806.13 26475.87,29760.22 26542.37,29693.72 26542.37,29689.25 26563,29668.62 IC2.2
12: IC2.3 P4.4 | length 158.5
  Bottom Layer w50: P4.4@26373,29772.19 26373,29766.57 26382.63,29756.94 26382.63,29753.46 26442.37,29693.72 26442.37,29689.25 26463,29668.62 IC2.3
13: IC2.4 P4.5 | length 156.3
  Bottom Layer w50: P4.5@26278,29772.07 26278,29761.57 26282.63,29756.94 26282.63,29753.46 26342.37,29693.72 26342.37,29689.25 26363,29668.62 IC2.4
14: IC2.5 P4.6 | length 158
  Bottom Layer w50: P4.6@26182.06,29772.16 26178,29768.1 26178,29761.57 26187,29752.57 26187,29749.09 26242.37,29693.72 26242.37,29689.25 26263,29668.62 IC2.5
15: IC2.6 P4.7 | length 161.9
  Bottom Layer w50: P4.7@26079,29777.23 26078,29776.23 26078,29761.57 26082.63,29756.94 26082.63,29753.46 26142.37,29693.72 26142.37,29689.25 26163,29668.62 IC2.6
16: IC2.7 P4.8 | length 159.9
  Bottom Layer w50: P4.8@25982.06,29774.02 25978,29769.96 25978,29761.57 25983,29756.57 25983,29753.09 26042.37,29693.72 26042.37,29689.25 26063,29668.62 IC2.7
17: IC3.15 P5.1 | length 888
  Top Layer w50: v1(27759.78,29273.9) 27762.23,29273.9 27777.13,29259 27940.09,29259 27998,29316.91 v1(27998,29654) ; IC3.15@27805.5,29328.88 27822.37,29345.75 27824.28,29345.75 IC3.15@27816.5,29337.97
  Bottom Layer w50: v1(27759.78,29273.9) 27759.78,29276.35 27805.5,29322.07 27805.5,29346.5 IC3.15 ; P5.1@27951,29781 27996.27,29735.73 27996.27,29655.73 v1(27998,29654)
18: IC3.1 P5.2 | length 193.4
  Bottom Layer w50: P5.2 27823.13,29792.44 27850.63,29764.94 27850.63,29747.43 27896.63,29701.43 27896.63,29666.37 IC3.1
19: IC3.2 P5.3 | length 193.4
  Bottom Layer w50: P5.3 27723.13,29792.44 27785.63,29729.94 27785.63,29720.51 27805.5,29700.64 27805.5,29657.5 IC3.2
20: IC3.3 P5.4 | length 193.4
  Bottom Layer w50: P5.4 27623.13,29793.97 27705.5,29711.6 27705.5,29657.5 IC3.3
21: IC3.4 P5.5 | length 193.4
  Bottom Layer w50: P5.5 27523.13,29793.97 27605.5,29711.6 27605.5,29657.5 IC3.4
22: IC3.5 P5.6 | length 193.4
  Bottom Layer w50: P5.6 27423.13,29793.97 27505.5,29711.6 27505.5,29657.5 IC3.5
23: IC3.6 P5.7 | length 193.4
  Bottom Layer w50: P5.7 27323.13,29793.97 27405.5,29711.6 27405.5,29657.5 IC3.6
24: IC3.7 P5.8 | length 193.4
  Bottom Layer w50: P5.8 27223.13,29793.97 27305.5,29711.6 27305.5,29657.5 IC3.7
25: IC4.15 P6.1 | length 857.4
  Top Layer w50: v1@27735.6,28420.1 27735.6,28416.63 27726,28407.02 27726,28249.29 27755.29,28220 v1(28120,28220)
  Bottom Layer w50: v1@27735,28419.5 27819.5,28419.5 IC4.15 ; v1@28122.45,28220 28123.79,28221.34 28183.47,28221.34 28250,28287.87 28250,28300.37 28257.5,28307.87 P6.1
  other v1: 27735.53,28419
26: IC4.1 P6.2 | length 165.8
  Bottom Layer w50: IC4.1 28134.37,28334.37 28156.46,28334.37 28222.46,28400.37 28245.94,28400.37 P6.2@28250.57,28405
27: IC4.2 P6.3 | length 186.4
  Bottom Layer w50: IC4.2 28137.62,28420 28158.25,28440.63 28162.72,28440.63 28227.09,28505 28267.13,28505 P6.3
28: IC4.3 P6.4 | length 186.4
  Bottom Layer w50: IC4.3 28137.62,28520 28158.25,28540.63 28162.72,28540.63 28227.09,28605 28267.13,28605 P6.4
29: IC4.4 P6.5 | length 187
  Bottom Layer w50: IC4.4 28137.62,28620 28158.25,28640.63 28162.72,28640.63 28227.09,28705 28271.6,28705 P6.5@28271.71,28705.11
30: IC4.5 P6.6 | length 186.4
  Bottom Layer w50: IC4.5 28137.62,28720 28158.25,28740.63 28162.72,28740.63 28227.09,28805 28267.13,28805 P6.6
31: IC4.6 P6.7 | length 186.4
  Bottom Layer w50: IC4.6 28137.62,28820 28158.25,28840.63 28162.72,28840.63 28227.09,28905 28267.13,28905 P6.7
32: IC4.7 P6.8 | length 186.4
  Bottom Layer w50: IC4.7 28137.62,28920 28158.25,28940.63 28162.72,28940.63 28227.09,29005 28267.13,29005 P6.8
33: IC5.15 P7.1 | length 900.8
  Top Layer w50: v1(27735.53,27470) 27735.53,27467.55 27720,27452.02 27720,27284.82 27764.82,27240 v1(28120,27240)
  Bottom Layer w50: v1(27735.53,27470) IC5.15 ; v1(28120,27240) 28121.73,27241.73 28153.86,27241.73 28250,27337.87 28250,27350.37 28257.5,27357.87 P7.1
34: IC5.1 P7.2 | length 186.4
  Bottom Layer w50: IC5.1 28134.37,27384.37 28156.46,27384.37 28227.09,27455 28267.13,27455 P7.2
35: IC5.2 P7.3 | length 189.3
  Bottom Layer w50: IC5.2 28137.62,27470 28158.25,27490.63 28162.72,27490.63 28227.09,27555 28270,27555 P7.3@28272.87,27557.87
36: IC5.3 P7.4 | length 186.4
  Bottom Layer w50: IC5.3 28137.62,27570 28158.25,27590.63 28162.72,27590.63 28227.09,27655 28267.13,27655 P7.4
37: IC5.4 P7.5 | length 186.4
  Bottom Layer w50: IC5.4 28137.62,27670 28158.25,27690.63 28162.72,27690.63 28227.09,27755 28267.13,27755 P7.5
38: IC5.5 P7.6 | length 186.4
  Bottom Layer w50: IC5.5 28137.62,27770 28158.25,27790.63 28162.72,27790.63 28227.09,27855 28267.13,27855 P7.6
39: IC5.6 P7.7 | length 186.4
  Bottom Layer w50: IC5.6 28137.62,27870 28158.25,27890.63 28162.72,27890.63 28227.09,27955 28267.13,27955 P7.7
40: IC5.7 P7.8 | length 186.4
  Bottom Layer w50: IC5.7 28137.62,27970 28158.25,27990.63 28162.72,27990.63 28227.09,28055 28267.13,28055 P7.8
41: IC6.15 P8.1 | length 847.4
  Top Layer w50: v1(27735.53,26516) 27735.53,26513.55 27726,26504.02 27726,26356.82 27764.82,26318 v1@28121,26318
  Bottom Layer w50: v1@27735.53,26520 IC6.15 ; v1@28121,26318 28122.73,26319.73 28164.88,26319.73 28209.21,26364.06 28209.21,26364.71 28257.5,26413 P8.1
  other v1: 28120,26318
42: IC6.1 P8.2 | length 188.5
  Bottom Layer w50: IC6.1 28134.37,26434.37 28157.3,26434.37 28233.06,26510.13 28267.13,26510.13 P8.2
43: IC6.2 P8.3 | length 188.5
  Bottom Layer w50: IC6.2 28137.62,26520 28151.99,26534.37 28160.37,26534.37 28236.13,26610.13 28267.13,26610.13 P8.3
44: IC6.3 P8.4 | length 188.5
  Bottom Layer w50: IC6.3 28125.5,26625.5 28157.5,26625.5 28242.13,26710.13 28267.13,26710.13 P8.4
45: IC6.4 P8.5 | length 188.5
  Bottom Layer w50: IC6.4 28125.5,26725.5 28162.5,26725.5 28242.5,26805.5 28245.94,26805.5 28253.44,26813 P8.5
46: IC6.5 P8.6 | length 188.5
  Bottom Layer w50: IC6.5 28125.5,26825.5 28160.5,26825.5 28240.5,26905.5 28245.94,26905.5 28253.44,26913 P8.6
47: IC6.6 P8.7 | length 188.5
  Bottom Layer w50: IC6.6 28125.5,26925.5 28158.94,26925.5 28243.57,27010.13 28267.13,27010.13 P8.7
48: IC6.7 P8.8 | length 188.5
  Bottom Layer w50: IC6.7 28125.5,27025.5 28167.01,27025.5 28254.52,27113 P8.8
49: IC7.15 P9.1 | length 866.3
  Top Layer w50: v1(27107,25790) 27107,26151.71 27136.29,26181 27295.55,26181 27304.55,26172 v1@27307,26172
  Bottom Layer w50: v1(27107,25790) 27108.73,25788.27 27108.73,25725.64 27198.87,25635.5 P9.1 ; v1@27307,26172 27308.73,26170.27 27308.73,26092.27 IC7.15
  other v1: 27307,26179.34
50: IC7.1 P9.2 | length 203.4
  Bottom Layer w50: IC7.1 27225.37,25775.63 27225.37,25730.57 27296,25659.94 27296,25625.87 P9.2
51: IC7.2 P9.3 | length 203.4
  Bottom Layer w50: IC7.2 27316.5,25784.5 27316.5,25731.36 27361,25686.86 27361,25685.51 27396,25650.51 27396,25625.87 P9.3
52: IC7.3 P9.4 | length 203.4
  Bottom Layer w50: IC7.3 27416.5,25784.5 27416.5,25723.29 27461,25678.79 27461,25675.9 27498.87,25638.03 P9.4
53: IC7.4 P9.5 | length 203.4
  Bottom Layer w50: IC7.4 27516.5,25784.5 27516.5,25720.4 27598.87,25638.03 P9.5
54: IC7.5 P9.6 | length 203.4
  Bottom Layer w50: IC7.5 27616.5,25784.5 27616.5,25720.4 27698.87,25638.03 P9.6
55: IC7.6 P9.7 | length 203.4
  Bottom Layer w50: IC7.6 27716.5,25784.5 27716.5,25720.4 27798.87,25638.03 P9.7
56: IC7.7 P9.8 | length 203.4
  Bottom Layer w50: IC7.7 27816.5,25784.5 27816.5,25720.4 27898.87,25638.03 P9.8
57: IC8.15 P10.1 | length 900.2
  Top Layer w50: v1(25822,25788) 25822,25950.27 25820,25952.27 25820,26150.71 25849.29,26180 v1@26020,26180
  Bottom Layer w50: v1(25822,25788) 25822,25785.55 25840.63,25766.92 25840.63,25724.22 25864.06,25700.79 25872.51,25700.79 25901.8,25671.5 25901.8,25600.07 P10.1 ; IC8.15 v1(26020,26179.34) v1@26020,26180
58: IC8.1 P10.2 | length 232.4
  Bottom Layer w50: IC8.1 25934.37,25775.63 25934.37,25753.54 26007.87,25680.04 P10.2
59: IC8.2 P10.3 | length 232.4
  Bottom Layer w50: IC8.2 26020,25772.38 26040.63,25751.75 26040.63,25747.28 26107.87,25680.04 P10.3
60: IC8.3 P10.4 | length 232.4
  Bottom Layer w50: IC8.3 26125.5,25784.5 26125.5,25762.41 26207.87,25680.04 P10.4
61: IC8.4 P10.5 | length 233.5
  Bottom Layer w50: IC8.4 26220,25772.38 26240.63,25751.75 26240.63,25747.28 26307.87,25680.04 P10.5@26307.87,25592.88
62: IC8.5 P10.6 | length 251.8
  Bottom Layer w50: IC8.5 26320,25772.38 26340.63,25751.75 26340.63,25747.28 26407.87,25680.04 P10.6@26407.87,25574.57
63: IC8.6 P10.7 | length 251.8
  Bottom Layer w50: IC8.6 26420,25772.38 26440.63,25751.75 26440.63,25747.28 26507.87,25680.04 P10.7@26507.87,25574.57
64: IC8.7 P10.8 | length 240.8
  Bottom Layer w50: IC8.7 26520,25772.38 26540.63,25751.75 26540.63,25747.28 26607.87,25680.04 P10.8@26607.87,25585.56
65: IC9.15 R16.1 | length 228
  Bottom Layer w50: IC9.15 25660,27020 R16.1
66: IC9.1 R14.1 | length 97.7
  Bottom Layer w50: R14.1 25233,27119.5 25329.5,27119.5 IC9.1
67: IC9.2 R12.1 | length 96.2
  Bottom Layer w50: R12.1@25237,27023 25237,27020.5 25238.13,27019.37 25329.37,27019.37 IC9.2
68: IC9.3 R9.1 | length 97.7
  Bottom Layer w50: R9.1 25233,26919.5 25329.5,26919.5 IC9.3
69: IC9.4 R15.1 | length 97.7
  Bottom Layer w50: R15.1 25233,26819.5 25329.5,26819.5 IC9.4
70: IC9.5 R13.1 | length 99.8
  Bottom Layer w50: R13.1@25234,26713 25234,26714.5 25324.5,26714.5 IC9.5
71: IC9.6 R11.1 | length 100.5
  Bottom Layer w50: R11.1@25233,26615 25233,26617.5 25327.5,26617.5 IC9.6
72: IC9.7 R6.1 | length 94.7
  Bottom Layer w50: R6.1@25236,26519 25236,26519.5 25329.5,26519.5 IC9.7
+5: F1.2 IC1.10 IC1.16 IC2.10 IC2.16 IC3.10 IC3.16 IC4.10 IC4.16 IC5.10 IC5.16 IC6.10 IC6.16 IC7.10 IC7.16 IC8.10 IC8.16 IC9.10 IC9.16 U1.38 | length 29192.1
  Bottom Layer w20: IC1.10@25627.35,28420 25626.5,28420 25450.79,28595.71 25450.79,29381.79 25600.79,29531.79 26074.72,29531.79 ; IC9.10 25630.88,26520 25750.63,26400.25 25750.63,26010 25851.32,25909.31 26519.31,25909.31 26520,25910 ; IC2.10 26063,29520.07 26074.72,29531.79 ; IC8.10 26520,25910 ; 27214.45,29531.79 26074.72,29531.79 ; 27216.45,29531.79 27307,29531.79 ; IC3.10@27307,29348.79 27307,29531.79 ; IC7.10 27811,25909.21 ; IC6.10 28000,27020 ; IC5.10 27987.5,27970 27999.21,27981.72 27999.21,28920 ; IC4.10 27999.21,28920 ; 28000,27981.72 28000,27020 ; 28093,29479.07 28040.28,29531.79 27524.63,29531.79 27307,29531.79 ; 28094,29479.07 28094,29094.88 28040,29040.88 28040,29040 27999.21,28999.21 27999.21,28920 ; 26520,25910 26520.79,25909.21 27811,25909.21 ; 27811,25909.21 27987.5,25909.21 27999.21,25920.93 27999.21,26374.43 28000,26375.22 28000,27020
  Bottom Layer w50: F1.2@24720,28475 24720,28560 ; F1.2@24720,28675 24720,28560 ; IC1.10 25627.35,28420 25555.29,28420 25526,28390.71 25526,28269.92 25555.29,28240.63 25682.63,28240.63 26246,28804 26762.71,28804 26850.55,28716.16 26850.55,27017 ; IC1.16 25635.5,29025.5 25750.86,29025.5 25797.37,29072 26663,29072 ; IC9.16@25647.23,27120 25920,27120 ; IC8.16 25920,26420 ; U1.38@26637,27017 26850.55,27017 ; IC2.16 26663,29072 ; IC7.16 27211,26420 ; 27560.28,27379.72 27560.28,28320 ; 27560.28,29072.28 27560.28,28320 ; IC6.16 27560,26420 ; IC5.16 27570,27370 27560,27380 27560,26420 ; IC4.16 27560.28,28320 ; IC3.16 27911,29334.38 27928,29317.38 27928,29233.66 27898.71,29204.37 27692.37,29204.37 27560,29072 26663,29072 ; 24720,28560 24920.71,28560 24950,28530.71 24950,28350.24 24953,28347.24 24953,28284 25177,28060 26027.91,28060 26270,27817.91 26270,27120 ; 25920,26420 27211,26420 ; 25920,26420 25920,27120 ; 25920,27120 26270,27120 ; 26270,27120 26270,26772.29 26304.66,26737.63 26815.89,26737.63 26850.55,26772.29 26850.55,27017 ; 27211,26420 27560,26420
DAT: IC1.14 U1.12 | length 2360.6
  Top Layer w50: v1(25734,28821) 25735.5,28822.5 25903.5,28822.5 v1(25905,28824)
  Bottom Layer w50: IC1.14 25631,28821 v1(25734,28821) ; v1(25905,28824) 25959,28878 26806,28878 27000.79,28683.21 27000.79,28047.21 27126,27922 U1.12
G1: 7.2 R4.1 | length 164
  Bottom Layer w50: 7.2 24780,26758.67 24835.8,26702.87 24835.8,26648.54 R4.1
G2: 5.2 R3.1 | length 172.9
  Bottom Layer w50: 5.2 24760,26379.76 24835.8,26303.96 24835.8,26267.93 R3.1
G3: 3.2 R2.1 | length 173.6
  Bottom Layer w50: 3.2 24760,25999.76 24835.8,25923.96 24835.8,25887.31 R2.1
G4: 1.2 R1.1 | length 174.2
  Bottom Layer w50: 1.2 24763.06,25636.94 24763.06,25579.44 R1.1
GND: 1.1 2.1 3.1 4.1 5.1 6.1 7.1 8.1 BT1.4 IC1.8 IC1.13 IC2.8 IC2.13 IC3.8 IC3.13 IC4.8 IC4.13 IC5.8 IC5.13 IC6.8 IC6.13 IC7.8 IC7.13 IC8.8 IC8.13 IC9.8 IC9.13 P1.2 U1.19 U1.20 U1.39 | length 33138
  Bottom Layer w20: IC9.13 25639.84,26820 25855.63,26604.21 25855.63,26053.49 25894.81,26014.31 26145.19,26014.31 26198.79,26067.91 26220,26067.91 26220,26115 26409,26304 26790.99,26304 27079.21,26015.79 27446.63,26015.79 IC7.13@27511,26080.16 ; IC1.13 25629.12,28720 25555.79,28793.34 25555.79,29046.66 25560,29050.88 25560,29194.28 25571.72,29206 26232,29206 26363,29337 IC2.13 26371.97,29359.97 26371.97,29409.97 26387.21,29425.21 26721.28,29425.21 26733,29413.5 26733,29214.72 26744.72,29203 27462,29203 27536.79,29277.79 27537.66,29277.79 27611,29351.12 IC3.13 27611,29352.88 27684.34,29426.21 27685.21,29426.21 27685.79,29426.79 27971.28,29426.79 27983,29415.07 27983,29171.72 27965.65,29154.37 27754.5,29154.37 27615,29014.87 27615,28631.72 27626.72,28620 IC4.13 27844.47,28620 27894.21,28570.26 27894.21,28293.34 27856.51,28255.63 27856.13,28255.63 27841.13,28240.63 27621.99,28240.63 27610.28,28228.91 27610.28,27671.72 27621.99,27660 27800.16,27660 27810.16,27670 IC5.13 27834.94,27670 27834.94,27664.9 27894.21,27605.63 27894.21,27326.56 27867.65,27300 27650.22,27300 27611,27260.78 27611,26906.91 27700.8,26817.11 27783.54,26734.37 27788.01,26734.37 27802.38,26720 IC6.13 ; IC7.13 27511,26099.84 27616.16,26205 27705.88,26205 27894.21,26393.34 27894.21,26667.88 27890,26672.09 27862.72,26699.37 IC6.13@27858.25,26699.37
  Bottom Layer w30: IC1.8@25332.07,28320 25339.84,28320 25410.79,28390.94 25410.79,29398.36 25584.22,29571.79 25961.21,29571.79 ; 25560,26251 25679,26251 25710,26220 25710,25994.06 25834.75,25869.31 25990.69,25869.31 25990.79,25869.21 26620,25869.21 ; IC2.8@25961.21,29649.21 25961.21,29571.79 ; IC8.8 26620,25869.21 ; 27213,29574.79 27213,29577.07 IC3.8@27213,29639.34 ; 27541.2,29571.79 25961.21,29571.79 ; 27544.2,29571.79 28074.64,29571.79 28134,29512.43 28134,29042.51 28121.49,29030 IC4.8@28110,29030 ; IC7.8@27908,25785.06 27908,25869.21 ; 28040,28070 28040,28949.84 28094.24,29004.08 28094.24,29014.24 28100,29020 IC4.8 ; IC6.8 28040,27120 ; IC5.8 28113.27,28063.27 28040,28063.27 28040,27120 ; 26620,25869.21 27908,25869.21 ; 27908,25869.21 28022.43,25869.21 28040,25886.79 28040,27120
  Bottom Layer w50: 24559.98,27115.03 24559.98,26780 ; 24559.98,27120.03 24559.98,27160 24560,27940 ; 24564.98,27163.93 24568.91,27160 2.1 ; 24565,27515 24567.84,27512.16 24572.87,27519.94 24652.61,27519.94 24660,27527.33 4.1 ; 1.1 24560,25640 ; 3.1 24560,26020 ; 5.1 24560,26400 ; 7.1 24559.98,26780 ; 6.1 24580,27920 24560,27940 ; 8.1 24560,28300 ; P1.2 25040,28765 ; 25151.15,26051.15 25000,25900 25000,25540.83 24876.67,25417.5 24702.5,25417.5 24560,25560 24560,25640 ; IC9.8 25494.37,26420 ; IC1.8 25330,28145 25335,28140 ; 25520,25780 25560,25820 25560,26251 25560,26340 25494.37,26405.63 25494.37,26706.46 25587.28,26799.37 25591.75,26799.37 25612.38,26820 IC9.13 ; U1.39@26639,26917 26478,26917 26424.21,26970.79 26424.21,28007.88 26312.72,28119.37 26308.25,28119.37 26287.62,28140 BT1.4 25330,28140 25214,28140 25040,28314 25040,28765 ; 24560,25640 24560,26020 ; 24560,26020 24560,26400 ; 24559.98,26400 24559.98,26780 ; 24560,27940 24560,28300 ; 24560,28300 24560,28652.28 24672.72,28765 25040,28765
LAT: IC1.12 IC2.12 IC3.12 IC4.12 IC5.12 IC6.12 IC7.12 IC8.12 IC9.12 U1.11 | length 12160.9
  Top Layer w20: v1(27350.47,27833.68) 27734.23,27833.68 v1(27734.81,27833.11)
  Bottom Layer w20: IC9.12 25630.88,26720 25704.21,26646.66 25704.21,26645.79 25820.63,26529.37 25820.63,26039 25880.32,25979.31 26219.15,25979.31 26320,26080.16 26320,26165.5 26423.5,26269 26776.5,26269 27065.5,25980 27599.28,25980 27611,25991.72 IC7.12 27616.45,26095.45 27616.45,26152.5 27628.17,26164.21 27714.59,26164.21 27929.21,26378.84 27929.21,26403.43 27930,26404.22 27930,26719.84 IC6.12@27829.84,26820 ; IC1.12 25620.16,28620 25520.79,28719.37 25520.79,29208.79 25553,29241 26162.84,29241 26263,29341.16 IC2.12 26263,29448.5 26274.72,29460.21 26743.28,29460.21 26768,29435.5 26768,29250.72 26779.72,29239 27398,29239 27436.79,29277.79 27437.66,29277.79 27511,29351.12 IC3.12 27511,29352.88 27584.34,29426.21 27585.21,29426.21 27620.79,29461.79 28011.28,29461.79 28023,29450.07 28023,29133.72 28008.65,29119.37 27769,29119.37 27650,29000.37 27650,28731.72 27661.72,28720 IC4.12 27829.84,28720 27929.21,28620.63 27929.21,28278.84 27871,28220.63 27870.63,28220.63 27840.63,28190.63 27656.99,28190.63 27645.28,28178.91 27645.28,27706.72 27656.99,27695 27744.12,27695 IC5.12@27819.12,27770 ; U1.11@27239,27817 27255.68,27833.68 v1(27350.47,27833.68) ; v1(27734.81,27833.11) 27742.28,27825.64 27763.49,27825.64 IC5.12@27819.12,27770 ; IC6.12 27810.16,26820 27646,26984.16 27646,27246.28 27659.72,27260 27902.8,27260 27930,27287.2 27930,27669.84 IC5.12@27829.84,27770 ; IC5.12 IC5.12@27819.12,27770
Net1_3: 1.3 R6.2 | length 1045.4
  Bottom Layer w30: 1.3 24940,25720 24940,26040 24969,26069 24969,26429 25059,26519 R6.2
Net2_2: 2.2 R5.1 | length 155.1
  Bottom Layer w50: 2.2 24803.06,27156.94 24803.06,27071.37 24842.5,27031.93 R5.1
Net2_3: 2.3 R9.2 | length 355.8
  Bottom Layer w30: 2.3 24900,27152.74 24916.63,27136.11 24930.96,27136.11 25105.57,26961.5 25115.43,26961.5 25133,26943.93 25133,26929 R9.2
Net3_3: 3.3 R11.2 | length 726
  Bottom Layer w30: 3.3@24867.5,26035 24867.5,26044.5 24924,26101 24924,26447.64 25091.11,26614.75 25138.75,26614.75 R11.2
Net4_2: 4.2 R7.1 | length 171.1
  Bottom Layer w50: 4.2 24760,27519.76 24835.8,27443.96 24835.8,27409.78 R7.1
Net4_3: 4.3 R12.2 | length 646.9
  Bottom Layer w30: 4.3 24860,27532.74 24876.63,27516.11 24891.43,27516.11 24953,27454.54 24953,27211.5 25143,27021.5 R12.2
Net5_3: 5.3 R13.2 | length 444.3
  Bottom Layer w30: 5.3 24866.89,26406.89 24866.89,26454.17 25119.22,26706.5 25133,26706.5 25143,26716.5 R13.2
Net6_2: 6.2 R8.1 | length 162.2
  Bottom Layer w50: 6.2 24780,27898.67 24835.8,27842.87 24835.8,27790.39 R8.1
Net6_3: 6.3 R14.2 | length 909.9
  Bottom Layer w30: 6.3 24880,27902.69 24998,27784.69 24998,27266.5 25143,27121.5 R14.2
Net7_3: 7.3 R15.2 | length 282.4
  Bottom Layer w30: 7.3 24880,26787.26 24906.4,26813.65 24913.65,26813.65 24916.5,26816.5 R15.2@25143,26816.5
Net8_2: 8.2 R10.1 | length 161.6
  Bottom Layer w50: 8.2 24780,28278.67 24835.8,28222.87 24835.8,28171.01 R10.1
Net8_3: 8.3 R16.2 | length 1834.2
  Bottom Layer w30: 8.3 24880,28273.26 24895.65,28257.6 24895.65,28248.35 25043,28101 25043,27297.57 25060.57,27280 R16.2
NetBT1_5: BT1.5 U1.40 | length 1535.5
  Bottom Layer w50: BT1.5 26287.62,28040 26308.25,28019.37 26312.72,28019.37 26359.21,27972.88 26359.21,26846.29 26388.5,26817 U1.40@26639,26817
NetD1_1: D1.1 P1.1 | length 261.4
  Bottom Layer w50: P1.1 24840,29550.16 24935.16,29455 24935.16,29344.84 D1.1
NetD1_2: D1.2 F1.1 | length 537.8
  Bottom Layer w50: F1.1@24720,29325 24720,29125 24910.71,29125 24940,29095.71 D1.2
NetIC1_9: IC1.9 IC2.14 | length 1761.8
  Top Layer w20: v1(26463,29271) v1@26464.5,29269.5 ; v1@26464.5,28998.56 v1(26466,28997.06)
  Top Layer w50: v1@26464.5,28998.56 v1@26464.5,29269.5
  Bottom Layer w50: IC1.9 25647.62,28320 25668.25,28340.63 25672.72,28340.63 25804.53,28472.44 25804.53,28967.77 25833.82,28997.06 v1(26466,28997.06) ; v1(26463,29271) IC2.14
NetIC2_9: IC2.9 IC3.14 | length 2187.9
  Layer 2 w50: v1(25881,29350) 25881,29188.23 25920.76,29148.47 v1(27344,29148.47)
  Bottom Layer w50: v1(25881,29350) 25881.5,29350.5 25962.5,29350.5 IC2.9 ; v1(27344,29148.47) 27346.45,29148.47 27350.98,29153 27534.09,29153 27690.37,29309.28 27690.37,29313.75 27711,29334.38 IC3.14
NetIC3_9: IC3.9 IC4.14 | length 1580.4
  Layer 1 w50: v1(27126,29349) 27126,29034.29 27155.29,29005 27631.71,29005 27661,28975.71 v1(27661,28514)
  Bottom Layer w50: v1(27126,29349) 27127.5,29350.5 27206.51,29350.5 IC3.9@27208,29351.99 ; v1(27661,28514) 27663.45,28514 27669.45,28520 IC4.14
NetIC4_9: IC4.9 IC5.14 | length 1899.9
  Top Layer w30: IC4.9@27803.2,29020 IC4.9
  Layer 2 w50: v1(27735.53,27570) 27591.29,27570 27562,27599.29 27562,28845.43 27591.29,28874.72 v1(27739.53,28874.72)
  Bottom Layer w30: v1@27730,27570 v1(27735.53,27570) IC5.14 ; v1(27739.53,28874.72) 27740.79,28875.98 27740.79,28950.63 27803.2,29013.04 IC4.9@27803.2,29020
NetIC5_9: IC5.9 IC6.14 | length 1669.3
  Layer 1 w50: v1(27735.53,26620) 27641.95,26713.58 27641.95,27928.42 v1(27735.53,28022)
  Bottom Layer w30: v1@27734.53,28022 27740.09,28027.56 27754.53,28027.56 27796.97,28070 IC5.9 ; v1(27735.53,26620) IC6.14
NetIC6_9: IC6.9 IC7.14 | length 1410.5
  Top Layer w50: v1@27410,26172 27410,27069 27458,27117 v1(27735.53,27117)
  Bottom Layer w50: v1@27410,26172 27410.5,26171.5 27410.5,26090.5 IC7.14 ; v1(27735.53,27117) 27737.03,27118.5 27818.5,27118.5 IC6.9
  other v1: 27410,26179.34
NetIC7_9: IC7.9 IC8.14 | length 2031.5
  Layer 1 w50: v1(26120,26179.34) 26194.66,26254 27833.89,26254 27908.55,26179.34 v1(27911,26179.34)
  Bottom Layer w50: IC8.14 v1(26120,26179.34) ; IC7.9 v1(27911,26179.34)
NetIC8_9: IC8.9 IC9.14 | length 1670.3
  Top Layer w50: v1(25849,26740) 25849,26377.37 25878.29,26348.08 26590.71,26348.08 26620,26318.79 26620,26148.47
  Bottom Layer w30: IC9.14@25639.83,26919.83 25640.01,26919.83 25814.28,26745.56 25843.44,26745.56 v1(25849,26740)
  Bottom Layer w50: IC8.9 26620,26148.47
  other v1: 26620,26179.34
NetP2_1: P2.1 R1.2 | length 1208.7
  Bottom Layer w50: P2.1 24180,26026.44 24442.5,25763.94 R1.2
NetP2_2: P2.2 R2.2 | length 961.6
  Bottom Layer w50: P2.2 24196.56,26700 24224.06,26672.5 24241.57,26672.5 24280,26634.07 24280,26020 24401.88,25898.12 24415.53,25898.12 24433.03,25880.62 R2.2
NetP2_3: P2.3 R3.2 | length 694.4
  Bottom Layer w50: P2.3 24260,26800 24360,26700 24360,26344.9 24442.5,26262.4 R3.2
NetP2_4: P2.4 R4.2 | length 484
  Bottom Layer w50: P2.4 24380,26900 24442.5,26837.5 R4.2
NetP2_5: P2.5 R5.2 | length 278.8
  Bottom Layer w50: P2.5 24188.44,27000 24195.37,27006.93 24195.37,27018.81 24196.56,27020 24440.04,27020 R5.2
NetP2_6: P2.6 R7.2 | length 435.2
  Bottom Layer w50: P2.6 24182.87,27102.87 24222.87,27102.87 24442.5,27322.5 R7.2
NetP2_7: P2.7 R8.2 | length 701.2
  Bottom Layer w50: P2.7 24195.03,27200 24317.23,27322.2 24317.23,27658.43 R8.2
NetP2_8: P2.8 R10.2 | length 973
  Bottom Layer w50: P2.8 24180,27691.95 24442.5,27954.45 R10.2
RX: BT1.2 U1.26 | length 376.9
  Bottom Layer w30: BT1.2 26279.84,28340 26397.84,28222 U1.26
SHIFT: IC1.11 IC2.11 IC3.11 IC4.11 IC5.11 IC6.11 IC7.11 IC8.11 IC9.11 U1.10 | length 12301.3
  Top Layer w20: v1(27350.47,27753.49) 27351.96,27752 27438.77,27752 27440.01,27750.76 27710.24,27750.76 v1(27711.48,27749.53)
  Bottom Layer w20: IC9.11 25640,26620 25785.63,26474.37 25785.63,26024.5 25865.82,25944.31 26274.31,25944.31 26345.79,26015.79 26346.66,26015.79 26420,26089.12 26420,26209 26445,26234 26762,26234 27051,25945 27697.28,25945 27711,25958.72 27711,26111.13 27964.21,26364.34 27964.21,26388.93 27965,26389.72 27965,26784.84 IC6.11@27829.84,26920 ; IC1.11 25604.26,28520 25585.73,28538.54 25580.59,28538.54 25525.79,28593.34 25525.79,28594.21 25485.79,28634.21 25485.79,29224.07 25537.72,29276 26097.84,29276 26163,29341.16 IC2.11 26174.24,29362.24 26174.24,29483.5 26185.96,29495.21 26757.78,29495.21 26803,29449.99 26803,29289.5 26814.72,29277.79 27337.66,29277.79 27411,29351.12 IC3.11 27411,29352.88 27484.34,29426.21 27485.21,29426.21 27555.79,29496.79 28025.78,29496.79 28059,29463.57 28059,29120.22 28023.15,29084.37 27856.51,29084.37 27783.49,29084.37 27685,28985.88 27685,28831.72 27696.72,28820 IC4.11 ; U1.10@27239,27717 27253.44,27717 27289.93,27753.49 v1(27350.47,27753.49) ; v1(27711.48,27749.53) 27711.48,27760.1 27680.28,27791.3 27680.28,27960 ; IC6.11 27819.12,26920 27745.79,26993.34 27745.79,26994.21 27681,27059 27681,27188.28 27692.72,27200 27892.3,27200 27902.3,27210 27922.3,27210 27965,27252.7 27965,27734.84 IC5.11@27829.84,27870 ; IC5.11 27819.12,27870 27745.79,27943.34 27745.79,27944.21 27730,27960 27680.28,27960 ; IC4.11@27829.84,28820 27964.21,28685.63 27964.21,28244.21 27870,28150 27691.99,28150 27680.28,28138.28 27680.28,27960
TX: BT1.3 U1.27 | length 376.9
  Bottom Layer w30: BT1.3 26279.33,28230.67 26325.53,28230.67 26379.2,28177 26535.05,28177 26590.05,28122 U1.27
pads on no net: BT1.1 BT1.6 IC9.9 U1.1 U1.2 U1.3 U1.4 U1.5 U1.6 U1.7 U1.8 U1.9 U1.13 U1.14 U1.15 U1.16 U1.17 U1.18 U1.21 U1.22 U1.23 U1.24 U1.25 U1.28 U1.29 U1.30 U1.31 U1.32 U1.33 U1.34 U1.35 U1.36 U1.37

## Keep-outs
Keep-Out Layer:
  lines w6: 0,0 49805,0 49805,38930 0,38930 0,0 ; 24060,25360 28420,25360 28420,29920 24060,29920 24060,25360

## Other copper
Bottom Layer:
  region net GND: 1763 vertices and 2 holes, not listed, extent 25031.74,25450.42 25542.55,26161.15
  text "LED me do it for u" at 24109.26,28085.26 h90 r270

## Text inside footprints (layer, text, board x,y; h text height)
Designator1: Bottom Layer "PIF" at 25672.33,27514 h56.25